# Altium PCB Ecg_4l.PcbDoc
Units mm, origin at the board's own origin, x right, y up, seen from the top; angles counter-clockwise.
Board outline 50 x 50 mm, 4 copper layers (Top Layer, GND layer, Power layer, Bottom Layer), stack 0.625 mm thick; 101 components, 70 nets, 378 pads, 582 vias.
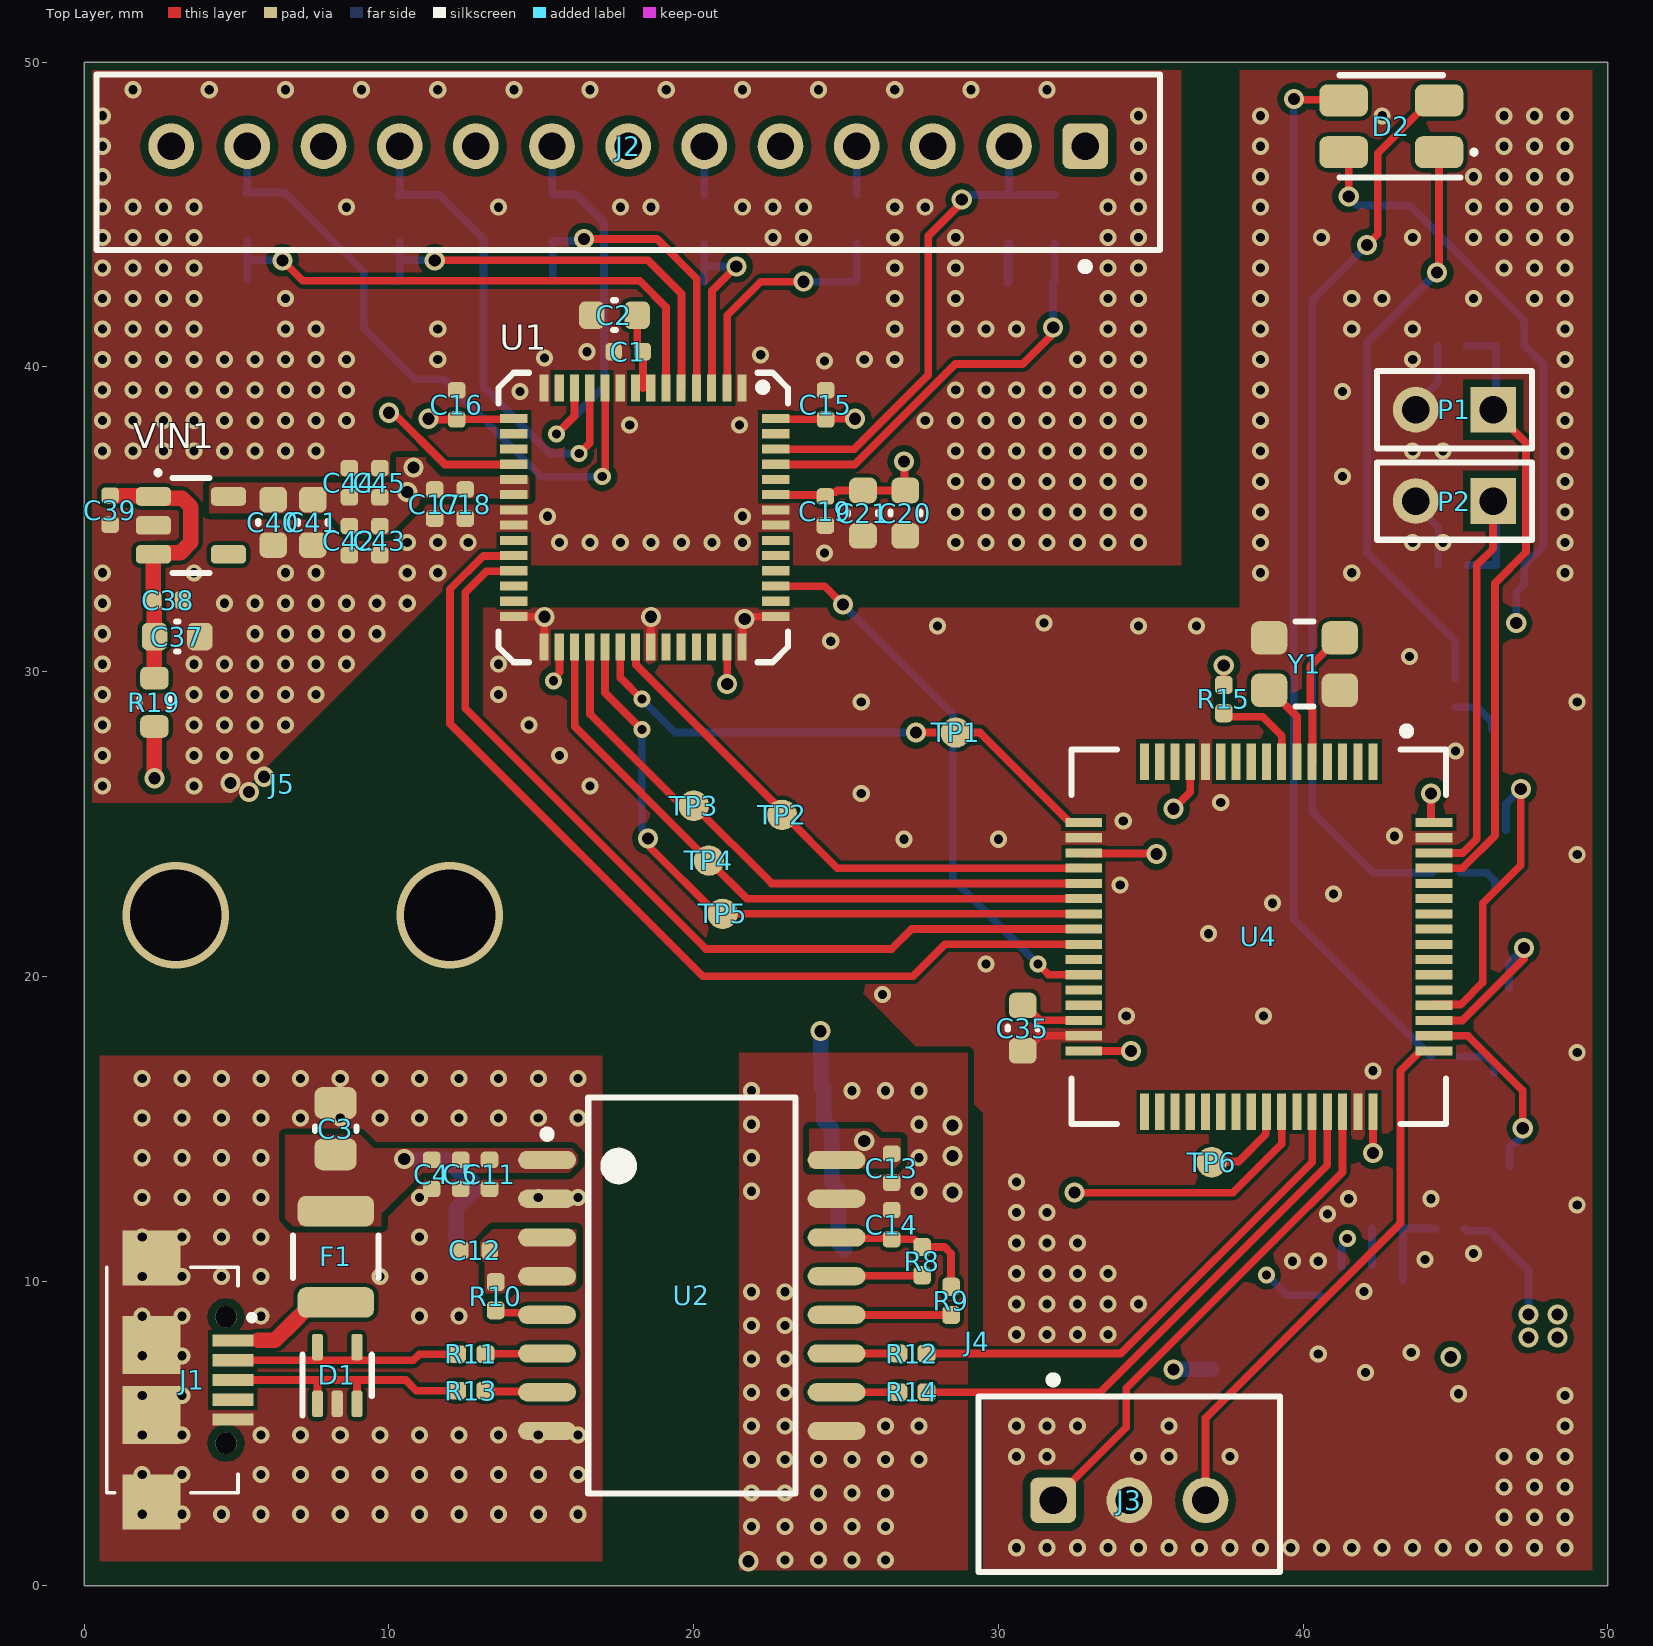
[diagram p0: Top Layer view]
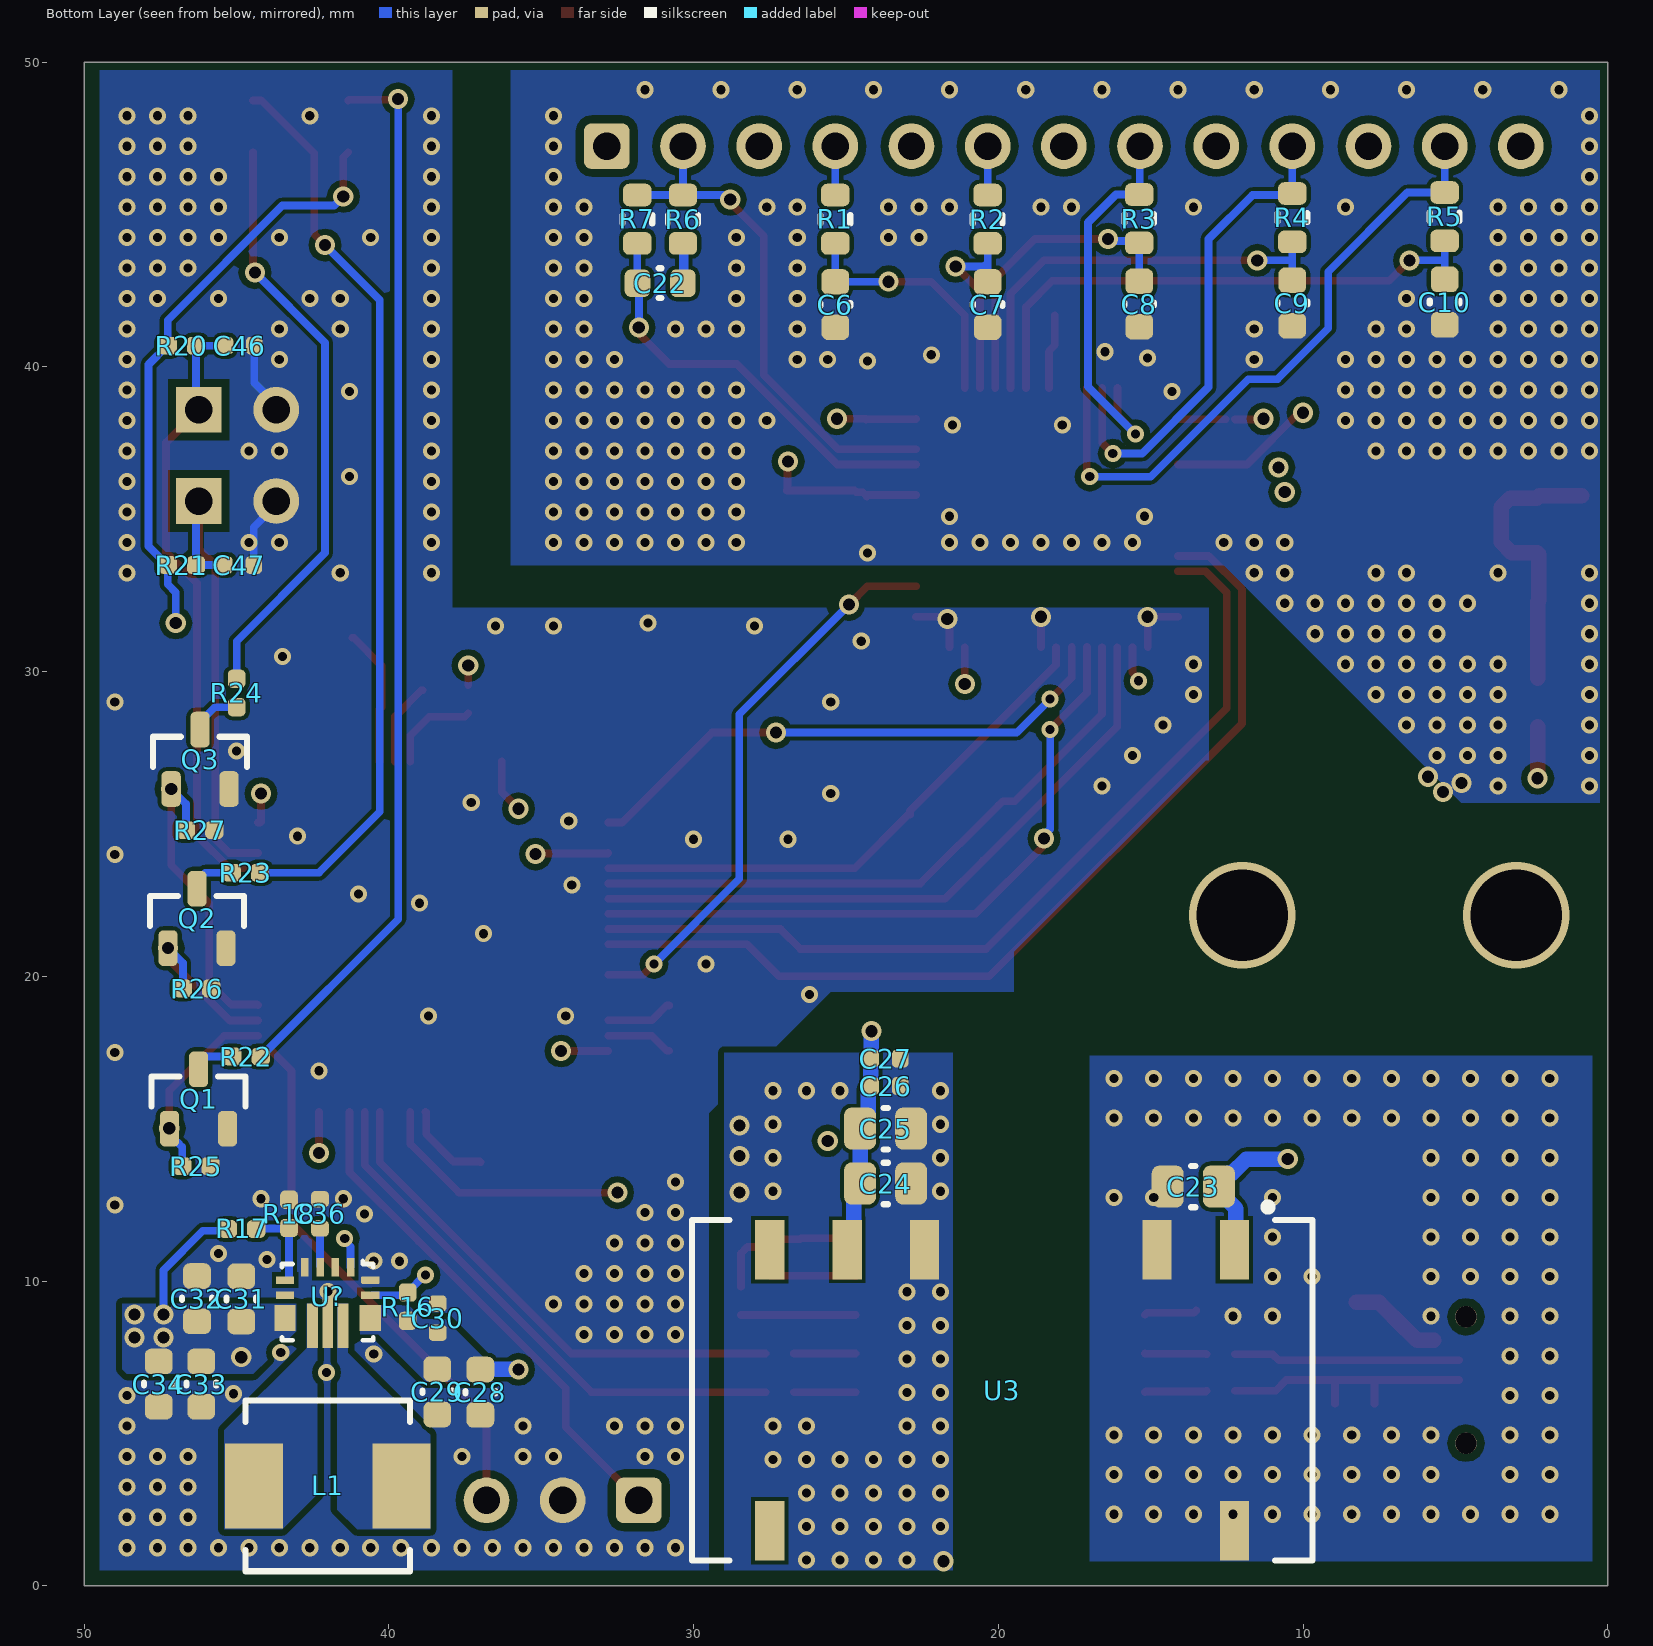
[diagram p1: Bottom Layer view, seen from below]
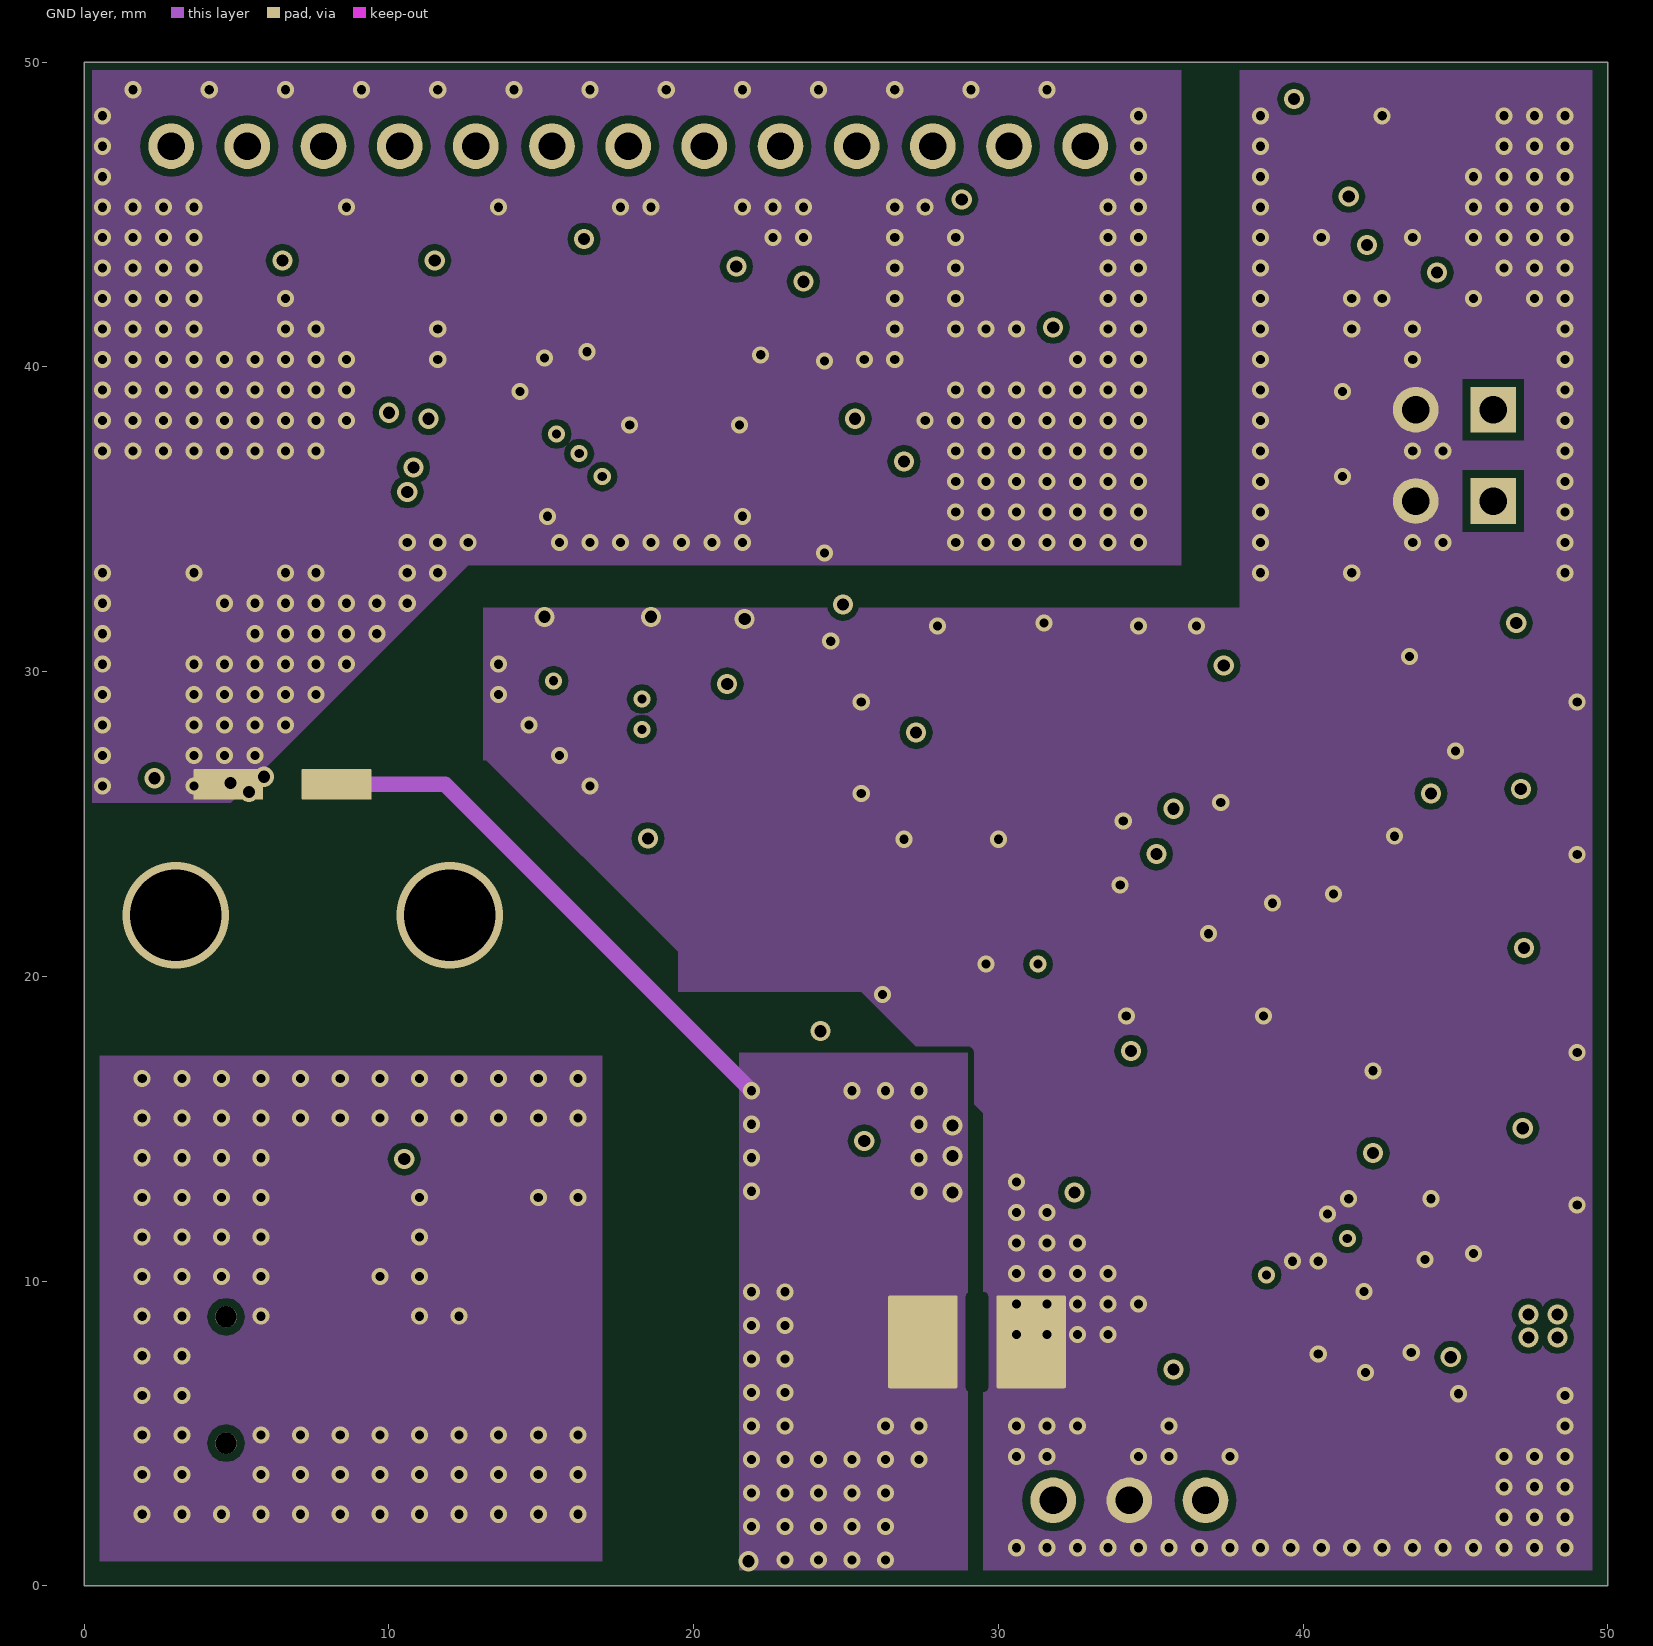
[diagram p2: GND layer]
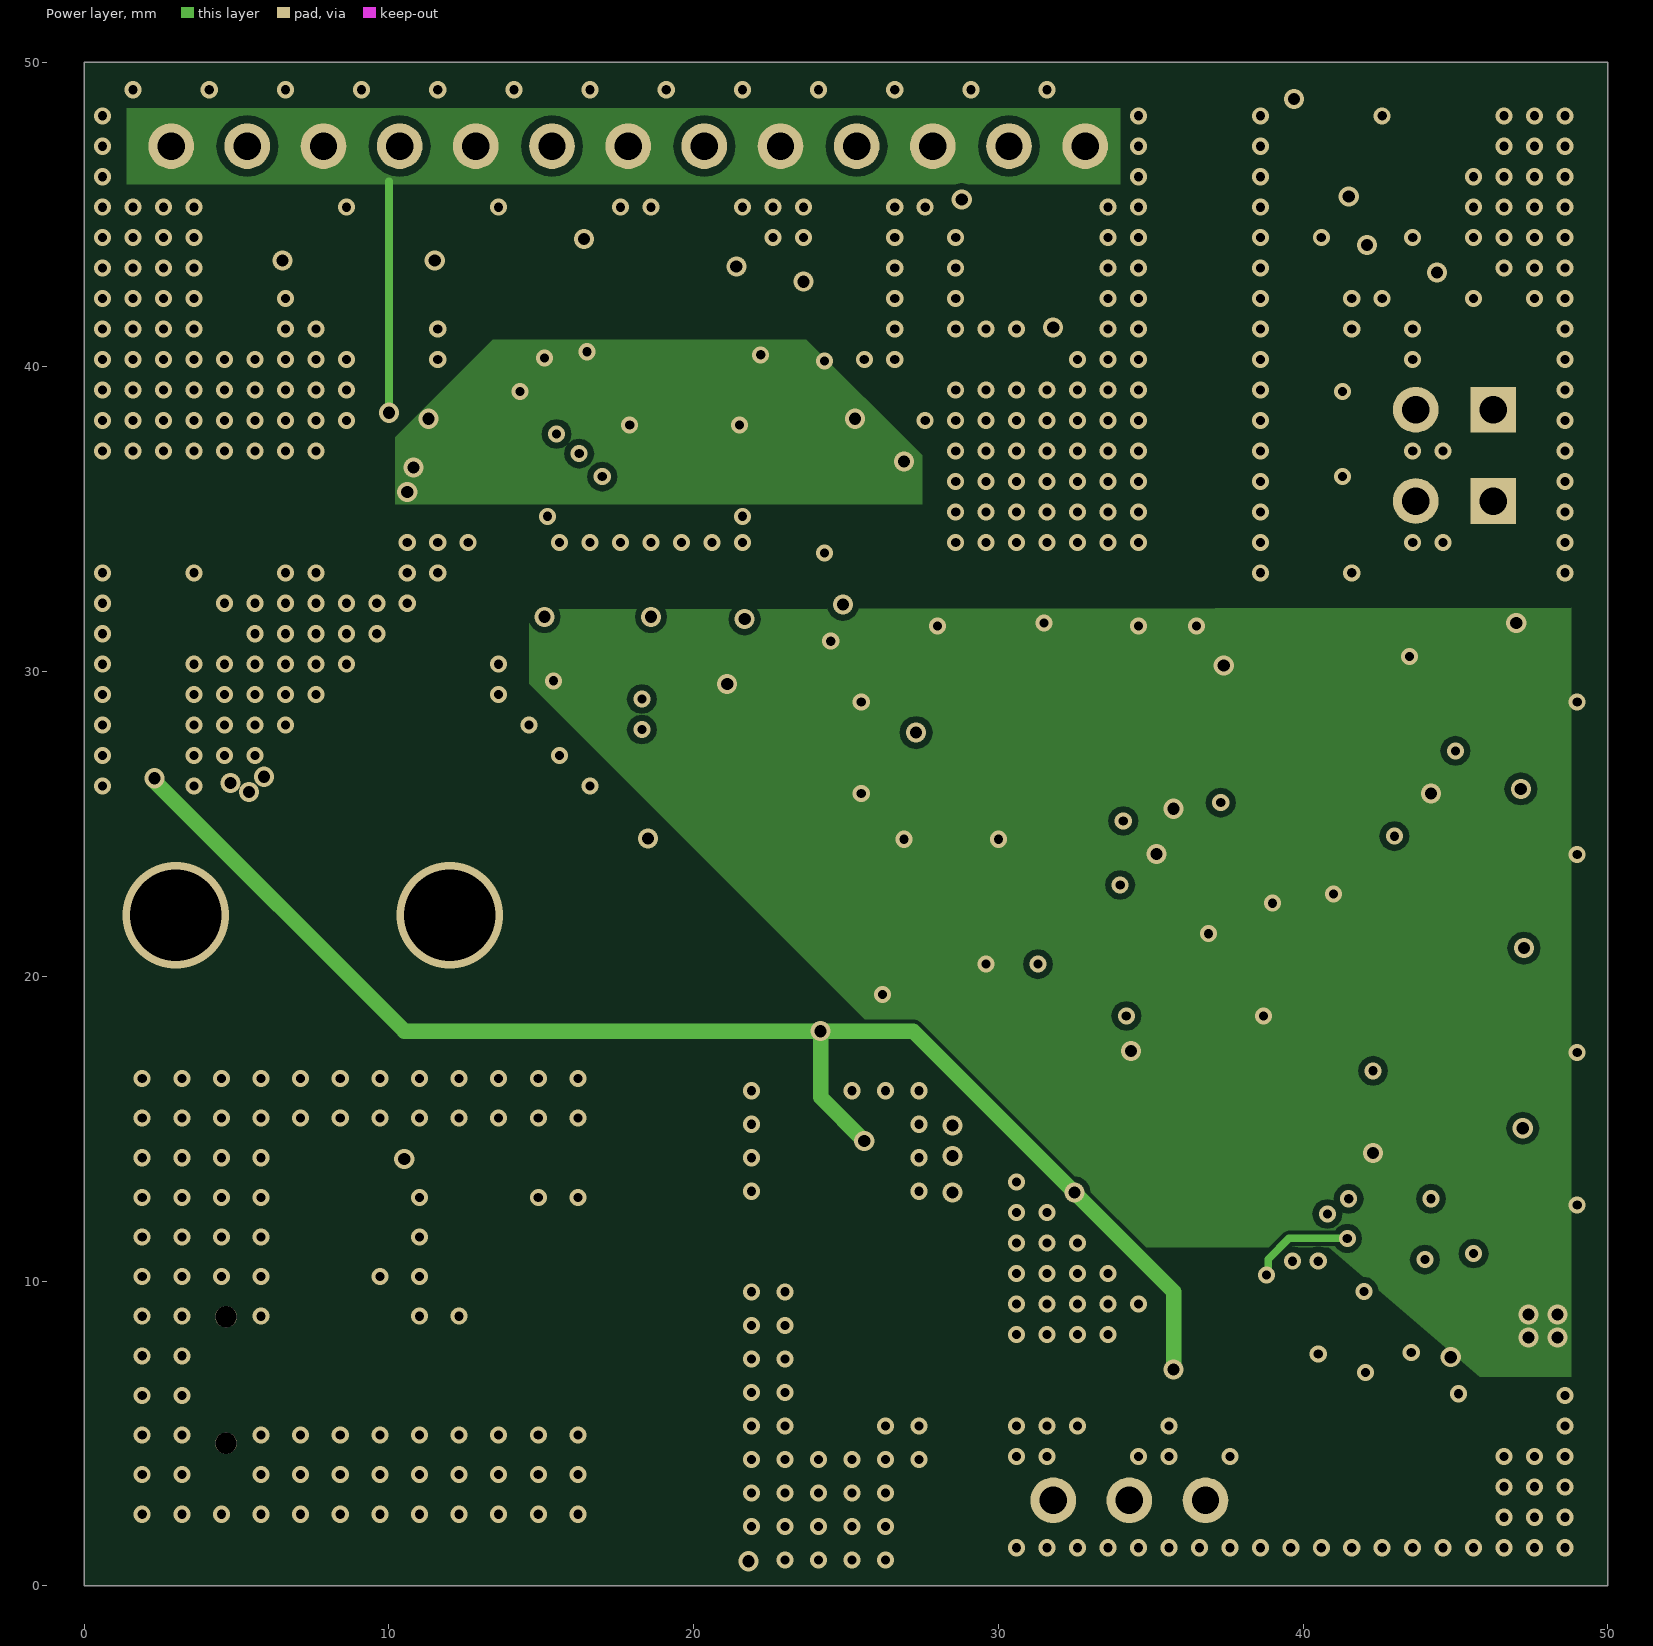
[diagram p3: Power layer]
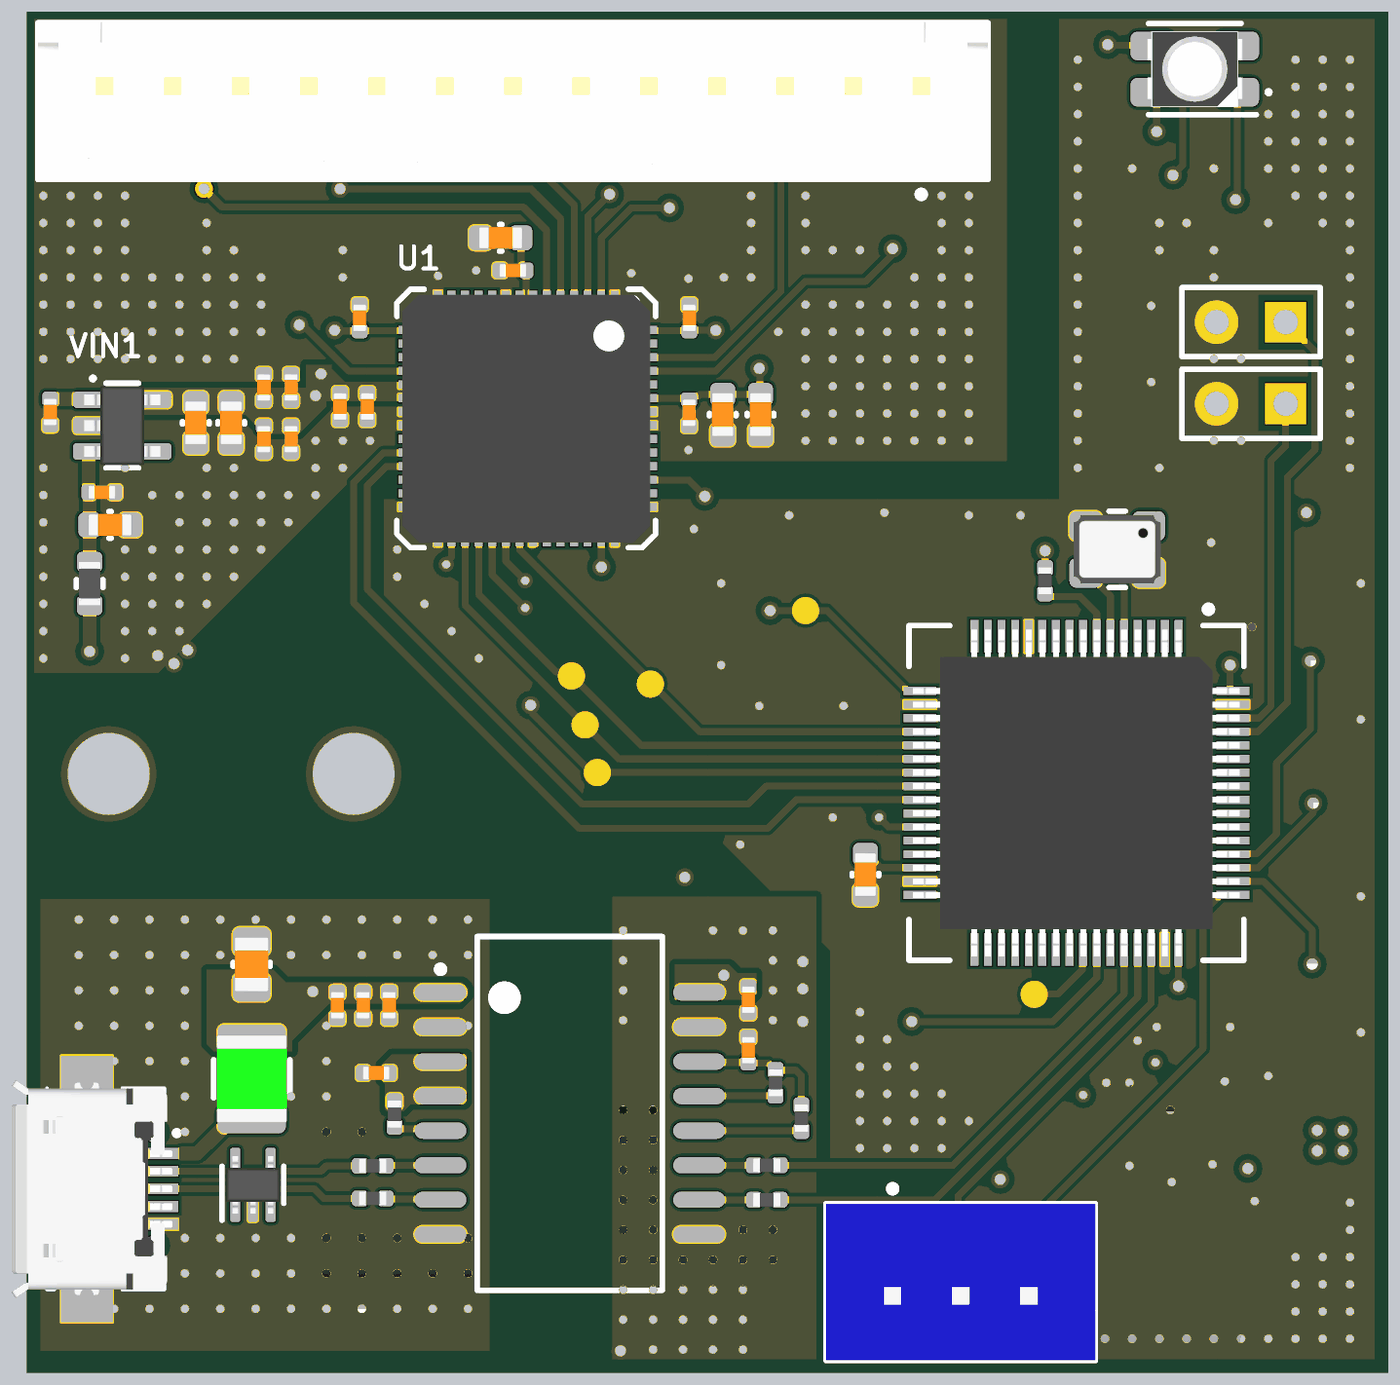
[diagram p4: 3D render of the assembled board from above, using the file's embedded part models]
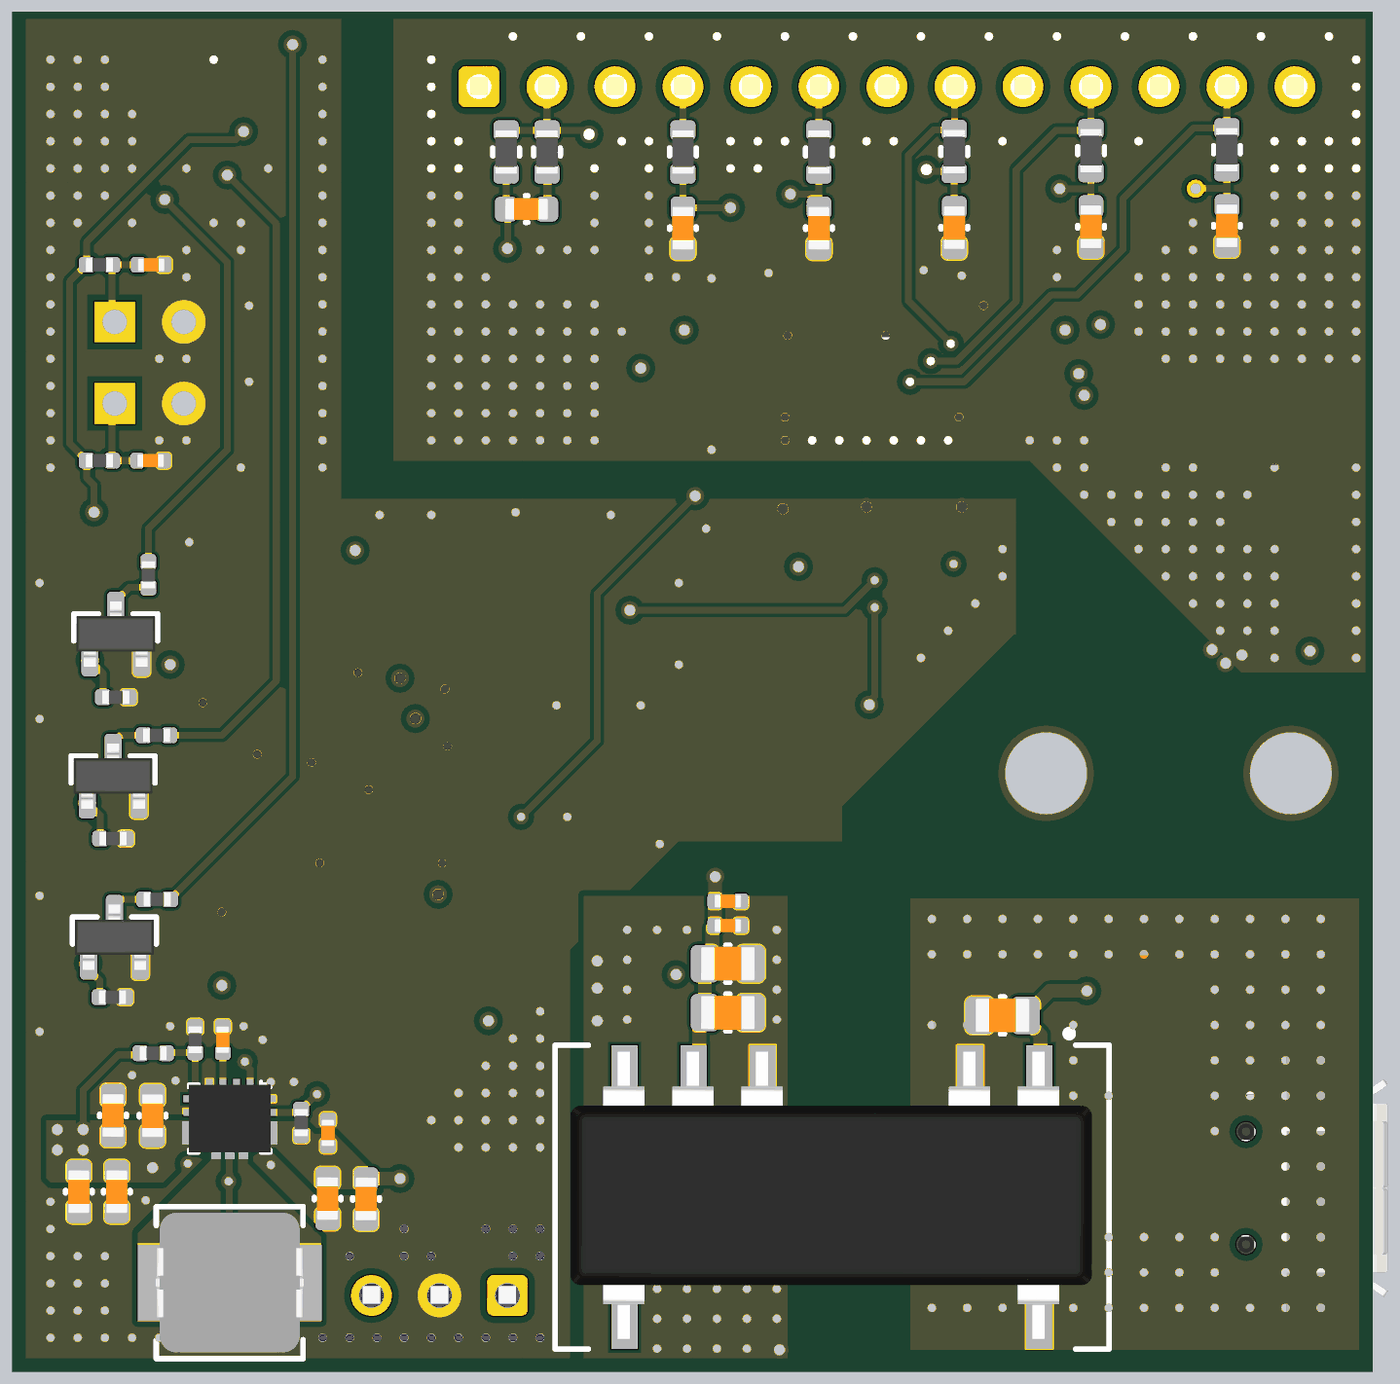
[diagram p5: 3D render of the assembled board from below, using the file's embedded part models]

## Layer stack, top to bottom
Top Solder: solder mask 0.0102, Solder Resist, Dk 3.5
Top Layer: signal copper 0.0356
Dielectric 2: prepreg 0.2083, PP-022, Dk 4.5
GND layer: signal copper 0.0178
Dielectric 1: core 0.1016, FR-4, Dk 4.5
Power layer: signal copper 0.0178
Dielectric 3: prepreg 0.2083, PP-022, Dk 4.5
Bottom Layer: signal copper 0.0356
Bottom Solder: solder mask 0.0102, Solder Resist, Dk 3.5

## Board outline
0,0 50,0 50,50 0,50

## Design rules (kind name [scope] priority, off if disabled: settings)
BoardOutlineClearance [All] p1: gap=0.254 ignorepadtopadclearanceinfootprint=FALSE except(0: Arc-SplitContinuation Track-SplitContinuation SMDPad-SplitContinuation THPad-SplitContinuation Via-SplitContinuation Fill-SplitContinuation Poly-SplitContinuation Region-SplitContinuation Text-SplitContinuation)
Clearance [All] p1: gap=0.2 ignorepadtopadclearanceinfootprint=FALSE except(0: Fill-Hole Poly-Hole Region-Hole Text-Hole; 0.09: Arc-Arc Arc-Track Track-Track; 0.127: Arc-SMDPad Arc-Fill Arc-Poly Arc-Region Track-SMDPad Track-Fill Track-Poly Track-Region SMDPad-SMDPad SMDPad-Fill SMDPad-Poly SMDPad-Region; 0.254: Arc-Text Track-Text SMDPad-Text THPad-Fill THPad-Poly THPad-Region THPad-Text Via-Text Fill-Text Poly-Text Region-Text Text-Text; 0.3: Arc-Hole Track-Hole SMDPad-Hole; 0.5: THPad-Hole Via-Hole)
HoleSize [All] p1: absolutevalues=TRUE maxlimit=6.3 minlimit=0.2 maxpercent=80.000 minpercent=20.000
MinimumAnnularRing [All] p1: minimumring=0.13
MinimumSolderMaskSliver [All] p1: minsoldermaskwidth=0.1
PlaneClearance [All] p1: clearance=0.254
PlaneConnect [All] p1: planeconnectstyle=Direct reliefexpansion=0.508 reliefentries=4 reliefconductorwidth=0.254 reliefairgap=0.254
PolygonConnect [All] p1: connectstyle=Direct reliefconductorwidth=0.254 reliefentries=4 polygonreliefangle="90 Angle" airgapwidth=0.254
RoutingVias [All] p1: holewidth=0.4 width=0.5 viastyle="Through Hole" minholewidth=0.3 minwidth=0.4 maxholewidth=1 maxwidth=1.5
SilkToSolderMaskClearance [IsPad] p1: minsilkscreentomaskgap=0.15 clearancetoexposedcopper=TRUE
SolderMaskExpansion [All] p1: expansion=0.05 istentingtop=FALSE
Width [All] p1: maxlimit=1.016 minlimit=0.254 preferedwidth=0.254 minimp=50.000000 maximp=50.000000 favimp=50.000000
25 further rules are at their usual default settings.

## Components (designator, comment, footprint, x,y, rotation, side; value= is the part's Value field where it differs from the comment)
C1 "100n" C0402_N 17.85,40.5 r180 top
C2 "10u" C0603_N 17.4,41.7 r180 top
C3 "10u" C0805_N 8.25,15 r90 top
C4 "100n" C0402_N 11.4,13.5 r270 top
C5 "100n" C0402_N 12.35,13.5 r270 top
C6 "10n" C0603_N 25.35,42.05 r90 bottom
C7 "10n" C0603_N 20.35,42.05 r90 bottom
C8 "10n" C0603_N 15.375,42.067 r90 bottom
C9 "10n" C0603_N 10.35,42.1 r90 bottom
C10 "10n" C0603_N 5.351,42.133 r90 bottom
C11 "100n" C0402_N 13.3,13.5 r270 top
C12 "100n" C0402_N 12.827,11.007 r180 top
C13 "100n" C0402_N 26.5,13.7 r270 top
C14 "100n" C0402_N 26.5,11.85 r90 top
C15 "100n" C0402_N 24.331,38.758 r90 top
C16 "100n" C0402_N 12.22,38.758 r90 top
C17 "100n" C0402_N 11.5,35.5 r270 top
C18 "100n" C0402_N 12.5,35.5 r270 top
C19 "100n" C0402_N 24.32,35.271 r270 top
C20 "10u" C0603_N 26.946,35.202 r270 top
C21 "10u" C0603_N 25.558,35.202 r270 top
C22 "2n" C0603_N 31.1,42.75 r180 bottom
C23 "10u" C0805_N 13.6,13.1 r0 bottom
C24 "10u" C0805_N 23.7,13.2 r180 bottom
C25 "10u" C0805_N 23.7,15 r180 bottom
C26 "100n" C0402_N 23.7,16.4 r180 bottom
C27 "100n" C0402_N 23.7,17.3 r180 bottom
C28 "10u" C0603_N 37,6.35 r270 bottom
C29 "10u" C0603_N 38.413,6.363 r270 bottom
C30 "100n" C0402_N 38.4,8.78 r90 bottom
C31 "22u" C0603_N 44.847,9.411 r90 bottom
C32 "10u" C0603_N 46.302,9.419 r90 bottom
C33 "1u" C0603_N 46.16,6.617 r270 bottom
C34 "100n" C0603_N 47.557,6.617 r270 bottom
C35 "10u" C0603_N 30.8,18.3 r270 top
C36 "100n" C0402_N 42.265,12.205 r90 bottom
C37 "1u" C0603_N 3.05,31.15 r0 top
C38 "100n" C0402_N 2.75,32.35 r0 top
C39 "100n" C0402_N 0.85,35.3 r270 top
C40 "10u" C0603_N 6.2,34.9 r270 top
C41 "1u" C0603_N 7.5,34.9 r270 top
C42 "100n" C0402_N 8.7,34.3 r270 top
C43 "100n" C0402_N 9.7,34.3 r270 top
C44 "100n" C0402_N 8.7,36.2 r90 top
C45 "10n" C0402_N 9.7,36.2 r90 top
C46 "100n" C0402_N 44.9,40.7 r180 bottom
C47 "100n" C0402_N 44.92,33.5 r180 bottom
D1 "ESDA25W5" SOT353_12345 8.3,6.9 r0 top
D2 "RGB" LED3528_RGB 42.9,47.9 r90 top
F1 "FUSE" FUSE1210 8.255,10.795 r270 top
J1 "USB_OTG" WR-COM-629105136821 2.2,5.6 r270 top
J2 "" B13B-XH-A 17.85,47.25 r180 top
J3 "" B3B-XH-A 31.8,2.8 r0 top
J4 "2 way net tie junction" 2way_HP#1 29.3,8 r0 top net-tie
J5 "2 way net tie junction" 2way_HP#2 6.5,26.3 r180 top net-tie
L1 "1.5u" IHLP2020 42.011,3.273 r0 bottom
P1 "Header 2" HDR1X2 46.24,38.6 r180 top
P2 "Header 2" HDR1X2 46.24,35.6 r180 top
Q1 "MOSFET_N" SOT23_123_N 46.25,15.975 r180 bottom
Q2 "MOSFET_N" SOT23_123_N 46.3,21.9 r180 bottom
Q3 "MOSFET_N" SOT23_123_N 46.2,27.125 r180 bottom
R1 "1k" R0603_N 25.35,44.85 r90 bottom
R2 "10k" R0603_N 20.35,44.85 r90 bottom
R3 "10k" R0603_N 15.375,44.867 r90 bottom
R4 "10k" R0603_N 10.35,44.9 r90 bottom
R5 "10k" R0603_N 5.351,44.933 r90 bottom
R6 "100k" R0603_N 30.35,44.85 r90 bottom
R7 "330k" R0603_N 31.85,44.85 r90 bottom
R8 "1M" R0402_N 27.5,10.65 r90 top
R9 "1M" R0402_N 28.45,9.35 r90 top
R10 "1M" R0402_N 13.5,9.5 r270 top
R11 "24R" R0402_N 12.7,7.6 r0 top
R12 "24R" R0402_N 27.178,7.62 r0 top
R13 "24R" R0402_N 12.7,6.4 r0 top
R14 "24R" R0402_N 27.178,6.35 r0 top
R15 "10k" R0402_N 37.4,29.1 r270 top
R16 "10k" R0402_N 39.386,9.157 r90 bottom
R17 "10k" R0402_N 44.825,11.707 r180 bottom
R18 "10k" R0402_N 43.281,12.205 r90 bottom
R19 "10R" R0603_N 2.3,28.995 r270 top
R20 "24R" R0402_N 46.8,40.7 r180 bottom
R21 "24R" R0402_N 46.8,33.5 r180 bottom
R22 "24R" R0402_N 44.677,17.368 r180 bottom
R23 "24R" R0402_N 44.7,23.4 r180 bottom
R24 "24R" R0402_N 45,29.3 r90 bottom
R25 "24R" R0402_N 46.324,13.769 r0 bottom
R26 "24R" R0402_N 46.3,19.6 r0 bottom
R27 "24R" R0402_N 46.2,24.8 r0 bottom
TP1 "TP" TP_1MM 28.6,28 r0 top
TP2 "TP" TP_1MM 22.9,25.3 r0 top
TP3 "TP" TP_1MM 20,25.6 r0 top
TP4 "TP" TP_1MM 20.5,23.8 r0 top
TP5 "TP" TP_1MM 20.95,22.05 r0 top
TP6 "TP" TP_1MM 37,13.9 r0 top
U1 "ADAS1000" LFCSP-56 21.59,39.81 r270 top
U2 "ADuM4160" "SOIC-16 Wide" 19.939,9.525 r0 top
U3 "DCPA10505" "SOP-14 (isolator)" 12.25,11.03 r270 bottom
U4 "STM32F446RE" LQFP64 42.3,27.05 r270 top
U? "TPS63070" RNM0015A 42.011,9.306 r270 bottom
VIN1 "ADP151" SOT23-5 3.5,34.8 r270 top
Y1 "XTAL_1234" 3225_N 40.05,30.25 r180 top

## Footprints (in the part's own frame and the unit in brackets; to place one, negate y for a bottom-side part, rotate by r counter-clockwise, add the part's x,y. Pads: shape width x height; smd on the part's side, far side on the other; paste and mask are expansions set on the pad)
2way_HP#1 [mil] "2 way high power power net tie junction"
  rrect5% 90x120 on Mid1 paste-100: 1(-70,0) 2(70,0)
2way_HP#2 [mil] "2 way high power power net tie junction"
  rrect5% 90x39.37 on Mid1 paste-100: 1(-70,0) 2(70,0)
3225_N [mm] "Oscillator, Corner Concave; 3.20 mm L X 2.50 mm W X 0.75 mm H body"
  rrect46% 1.19x1.09 smd: 1(-1.16,-0.86) 2(1.16,-0.86) 3(1.16,0.86) 4(-1.16,0.86)
  silkscreen extent -0.3,-1.4 0.3,1.4, body extent -1.6,-1.25 1.6,1.25, height 0.75
B3B-XH-A [mm] "Header, Vertical, 2.50 mm pitch; 0.70 mm lead width, 5 pins, 1 row, 5 pins per row, 14.90 mm L X 5.75 mm W X 7.00 mm H body"
  rrect33% 1.5x1.5 / inner round 1.5 / far side rrect33% 1.5x1.5 hole 0.9 paste-1.5: 1(0,0)
  round 1.5 hole 0.9 paste-1.5: 2(2.5,0) 3(5,0)
  silkscreen extent -2.45,-2.35 7.45,4.08, body extent -2.45,-2.35 7.45,3.4, height 7.05
B13B-XH-A [mm] "Header, Vertical, 2.50 mm pitch; 0.70 mm lead width, 13 pins, 1 row, 13 pins per row, 34.90 mm L X 5.75 mm W X 7.00 mm H body"
  rrect33% 1.5x1.5 / inner round 1.5 / far side rrect33% 1.5x1.5 hole 0.9 paste-1.5: 1(-15,0)
  round 1.5 hole 0.9 paste-1.5: 2(-12.5,0) 3(-10,0) 4(-7.5,0) 5(-5,0) 6(-2.5,0) 7(0,0) 8(2.5,0) 9(5,0) 10(7.5,0) 11(10,0) 12(12.5,0) 13(15,0)
  silkscreen extent -17.45,-2.35 17.45,4.08, body extent -17.45,-2.37 17.45,3.38, height 7
C0402_N [mm] "Capacitor, Chip; 1.00 mm L X 0.50 mm W X 0.55 mm H body"
  rrect52% 0.54x0.58 smd: 1(-0.48,0) 2(0.48,0)
  body extent -0.5,-0.25 0.5,0.25, height 0.55
C0603_N [mm] "Capacitor, Chip; 1.60 mm L X 0.80 mm W X 0.87 mm H body"
  rrect50% 0.84x0.91 smd: 1(-0.745,0) 2(0.745,0)
  silkscreen extent -0.05,-0.49 0.05,0.49, body extent -0.8,-0.4 0.8,0.4, height 0.87
C0805_N [mm] "Capacitor, Chip; 2.00 mm L X 1.25 mm W X 1.35 mm H body"
  rrect48% 1.05x1.38 smd: 1(-0.84,0) 2(0.84,0)
  silkscreen extent -0.08,-0.68 0.08,0.68, body extent -1,-0.63 1,0.63, height 1.35
FUSE1210 [mm] "Fuse, Chip; 3.215 mm L X 2.575 mm W X 1.80 mm H body"
  rrect50% 1x2.5 smd: 1(-1.5,0) 2(1.5,0)
  silkscreen extent -0.7,-1.4 0.7,1.4, body extent -1.61,-1.29 1.61,1.29, height 1.8
HDR1X2 [mm] "Connector; Header; 2 Position"
  rect 1.5x1.5 hole 0.9: 1(0,0)
  round 1.5 hole 0.9: 2(2.54,0)
  silkscreen extent -1.27,-1.27 3.81,1.27
IHLP2020 [mm] "Inductor, 5.18mm L X 5.18mm W X 3 mm H body"
  rect 1.905x2.79 smd: 1(-2.425,0) 2(2.425,0)
  silkscreen extent -2.7,-2.8 2.7,2.8, body extent -2.73,-2.57 2.73,2.57, height 2.84
LED3528_RGB [mm] "Small Outline L-Lead (SOL), 1.70 mm pitch; 4 pin, 2.80 mm L X 3.20 mm W X 2.10 mm H body"
  rrect48% 1.05x1.59 smd: A(-0.85,1.565) B(0.85,1.565) G(0.85,-1.565) R(-0.85,-1.565)
  silkscreen extent -1.68,-2.79 1.68,1.7, body extent -1.4,-1.75 1.4,1.75, height 1.9
LFCSP-56 [mm]
  rect 0.9x0.3 smd: 1(0.5,0) 2(0.5,-0.5) 3(0.5,-1) 4(0.5,-1.5) 5(0.5,-2) 6(0.5,-2.5) 7(0.5,-3) 8(0.5,-3.5) 9(0.5,-4) 10(0.5,-4.5) 11(0.5,-5) 12(0.5,-5.5) 13(0.5,-6) 14(0.5,-6.5) 29(9,-6.5) 30(9,-6) 31(9,-5.5) 32(9,-5) 33(9,-4.5) 34(9,-4) 35(9,-3.5) 36(9,-3) 37(9,-2.5) 38(9,-2) 39(9,-1.5) 40(9,-1) 41(9,-0.5) 42(9,0)
  rect 0.3x0.9 smd: 15(1.5,-7.5) 16(2,-7.5) 17(2.5,-7.5) 18(3,-7.5) 19(3.5,-7.5) 20(4,-7.5) 21(4.5,-7.5) 22(5,-7.5) 23(5.5,-7.5) 24(6,-7.5) 25(6.5,-7.5) 26(7,-7.5) 27(7.5,-7.5) 28(8,-7.5) 43(8,1.1) 44(7.5,1.1) 45(7,1.1) 46(6.5,1.1) 47(6,1.1) 48(5.5,1.1) 49(5,1.1) 50(4.5,1.1) 51(4,1.1) 52(3.5,1.1) 53(3,1.1) 54(2.5,1.1) 55(2,1.1) 56(1.5,1.1)
  silkscreen extent 0,-8 9.5,1.5, body extent 0.19,-7.81 9.31,2.5, height 12
LQFP64 [mm]
  rect 1.2x0.3 smd: 1(0,0) 2(0,-0.5) 3(0,-1) 4(0,-1.5) 5(0,-2) 6(0,-2.5) 7(0,-3) 8(0,-3.5) 9(0,-4) 10(0,-4.5) 11(0,-5) 12(0,-5.5) 13(0,-6) 14(0,-6.5) 15(0,-7) 16(0,-7.5) 33(11.5,-7.5) 34(11.5,-7) 35(11.5,-6.5) 36(11.5,-6) 37(11.5,-5.5) 38(11.5,-5) 39(11.5,-4.5) 40(11.5,-4) 41(11.5,-3.5) 42(11.5,-3) 43(11.5,-2.5) 44(11.5,-2) 45(11.5,-1.5) 46(11.5,-1) 47(11.5,-0.5) 48(11.5,0)
  rect 0.3x1.2 smd: 17(2,-9.5) 18(2.5,-9.5) 19(3,-9.5) 20(3.5,-9.5) 21(4,-9.5) 22(4.5,-9.5) 23(5,-9.5) 24(5.5,-9.5) 25(6,-9.5) 26(6.5,-9.5) 27(7,-9.5) 28(7.5,-9.5) 29(8,-9.5) 30(8.5,-9.5) 31(9,-9.5) 32(9.5,-9.5) 49(9.5,2) 50(9,2) 51(8.5,2) 52(8,2) 53(7.5,2) 54(7,2) 55(6.5,2) 56(6,2) 57(5.5,2) 58(5,2) 59(4.5,2) 60(4,2) 61(3.5,2) 62(3,2) 63(2.5,2) 64(2,2)
  silkscreen extent -1.12,-9.9 11.9,2.4, body extent -0.25,-9.75 11.75,2.25, height 1.56
R0402_N [mm] "Resistor, Chip; 1.00 mm L X 0.50 mm W X 0.40 mm H body"
  rrect52% 0.6x0.58 smd: 1(-0.465,0) 2(0.465,0)
  body extent -0.5,-0.25 0.5,0.25, height 0.4
R0603_N [mm] "Resistor, Chip; 1.60 mm L X 0.80 mm W X 0.55 mm H body"
  rrect51% 0.74x0.93 smd: 1(-0.795,0) 2(0.795,0)
  silkscreen extent -0.15,-0.49 0.15,0.49, body extent -0.8,-0.4 0.8,0.4, height 0.55
RNM0015A [mm]
  rect 0.6x0.25 smd mask+0.05: 1(-1.15,0.75) 2(-1.15,0.25) 3(-1.15,-0.25) 4(-1.15,-0.75)
  rect 0.25x0.6 smd mask+0.05: 5(-0.725,-1.4) 6(-0.225,-1.4) 14(-0.225,1.4)
  rect 0.85x0.7 smd mask-0.05: 7(0.525,-1.4) 8(0.525,-1.4) 12(0.525,1.4) 13(0.525,1.4)
  rect 1.45x0.35 smd mask-0.05: 9(0.775,-0.5) 11(0.775,0.5)
  rect 1.8x0.35 smd mask-0.05: 10(0.6,0)
  rrect30% 0.25x0.6 smd mask+0.05: 15(-0.725,1.4)
  silkscreen extent -1.35,-1.5 1.25,1.5, body extent -1.25,-1.5 1.25,1.5, height 1
"SOIC-16 Wide" [mm] "SOIC, 16-Leads, Body 13x7.50mm, Pitch 1.27mm, IPC Medium Density"
  oval 1.9x0.6 smd: 1(-4.75,4.445) 2(-4.75,3.175) 3(-4.75,1.905) 4(-4.75,0.635) 5(-4.75,-0.635) 6(-4.75,-1.905) 7(-4.75,-3.175) 8(-4.75,-4.445) 9(4.75,-4.445) 10(4.75,-3.175) 11(4.75,-1.905) 12(4.75,-0.635) 13(4.75,0.635) 14(4.75,1.905) 15(4.75,3.175) 16(4.75,4.445)
  silkscreen extent -4.87,-6.5 3.4,6.5, body extent -3.8,-5.25 3.8,5.25, height 2.65
"SOP-14 (isolator)" [mm] "SOP-14, 7-Leads, Body 7x19mm, Pitch 2,54mm"
  rect 1.95x0.96 smd: 1(0,0) 2(0,-2.54) 5(0,-10.17) 6(0,-12.71) 7(0,-15.25) 8(9.23,-15.25) 14(9.23,0)
  silkscreen extent -1.52,-17.8 10.2,2.56, body extent -0.73,-17.24 9.83,1.94, height 4.55
SOT23-5 [mm] "Small Outline Transistor (SOT23), 0.95 mm pitch; 5 pin, 2.90 mm L X 1.60 mm W X 1.45 mm H body"
  rrect49% 0.61x1.16 smd: 1(-0.95,-1.23) 2(0,-1.23) 3(0.95,-1.23) 4(0.95,1.23) 5(-0.95,1.23)
  silkscreen extent -1.8,-1.15 1.56,0.6, body extent -1.45,-1.4 1.45,1.4, height 1.45
SOT23_123_N [mm] "Small Outline Transistor (SOT23), 0.95 mm pitch; 3 pin, 2.90 mm L X 1.30 mm W X 1.10 mm H body"
  rrect51% 0.63x1.17 smd: 1(-0.95,-0.975) 2(0.95,-0.975) 3(0,0.975)
  silkscreen extent -1.54,-0.25 1.54,0.74, body extent -1.45,-1.2 1.45,1.2, height 1.1
SOT353_12345 [mm] "Small Outline Transistor (SOT23), 0.65 mm pitch; 5 pin, 2.00 mm L X 1.25 mm W X 1.00 mm H body"
  rrect49% 0.37x0.87 smd: 1(-0.65,-0.93) 2(0,-0.93) 3(0.65,-0.93) 4(0.65,0.93) 5(-0.65,0.93)
  silkscreen extent -1.14,-1.31 1.14,0.68, body extent -1,-1.05 1,1.05, height 1
TP_1MM [mm]
  round 1 smd paste-100 mask+0: 1(0,0)
WR-COM-629105136821 [mm] "5 pins"
  rect 0.4x1.35 smd: D_N(-1.8,2.675) D_P(-1.15,2.675) GND(0.15,2.675) ID(-0.5,2.675) VBUS(-2.45,2.675)
  rect 1.8x1.9 smd: S(-5.15,0) S(2.85,0)
  rect 1.9x1.9 smd: S(-2.3,0) S(0,0)
  round 0.7 hole 0.7 unplated: ""(-3.225,2.45) ""(0.925,2.45)
  silkscreen extent -4.85,-1.46 2.55,3.36, body extent -5.15,-2.76 2.85,3.15, height 2.69

## Part data
C1 C2 C3 C4 C5 C6 C7 C8 C9 C10 C11 C12 C13 C14 C15 C16 C17 C18 C19 C20 C21 C22 C23 C24 C25 C26 C27 C28 C29 C30 C31 C32 C33 C34 C35 C36 C37 C38 C39 C40 C41 C42 C43 C44 C45 C46 C47: library part CAP, RevS="$Rev:: 58        $"
D2: library part LED_RGB_CANODE
J1: "USB Connector, With Pegs, Micro USB Type B, USB 2.0, Receptacle, 5 Ways, Surface Mount, Right Angle"
J2: library part PINHDR_13X1, "Header", ComponentLink1Description=Manufacturer, ComponentLink1URL=http://www.we-online.de, ComponentLink2Description=Datasheet, ComponentLink2URL=http://katalog.we-online.de/em/datasheet/691412320002.pdf
J3: library part PINHDR_3X1, "Socket", ComponentLink1Description=Manufacturer, ComponentLink1URL=http://www.we-online.de, ComponentLink2Description=Datasheet, ComponentLink2URL=http://katalog.we-online.de/em/datasheet/691412320002.pdf
J4 J5: library part NetTie_2, ComponentLink1Description=Source, ComponentLink1URL=http://www.edatools.cz/addons, FootprintNote="LP=12mil, MP=40mil, HP=120mil"
L1: library part IND, "Inductor"
P1 P2: "Header, 2-Pin", LatestRevisionDate=17-Jul-2002, LatestRevisionNote="Re-released for DXP Platform.", Publisher="Altium Limited"
R1 R2 R3 R4 R5 R6 R7 R8 R9 R10 R11 R12 R13 R14 R15 R16 R17 R18 R19 R20 R21 R22 R23 R24 R25 R26 R27: library part RES
U1: "Low Power, Five Electrode / Electrocardiogram (ECG) Analog Front End"
U?: "2-V to 16-V Buck-Boost Converter With 3.6-A Switch Current"

## Via types
v1: diameter 0.56, hole 0.3, Top Layer to Bottom Layer, tented both sides, 528 vias
v2: diameter 0.66, hole 0.4, Top Layer to Bottom Layer, tented both sides, 51 vias
v3: diameter 3.5, hole 3, Top Layer to Bottom Layer, tented both sides, 2 vias
v4: diameter 0.66, hole 0.4, Top Layer to Bottom Layer, 1 vias

## Nets (pads, with @x,y where several pads share a name; then routed paths per layer and width w, separated by ;. In a path a pad name is that pad's centre, name@x,y a point inside that pad or via, vN(x,y) a via of type N, cw(c..) or ccw(c..) an arc to the next point about the centre after c; other vN are vias at no path point)
ADAS_CLKIO: U1.45 U4.27 | length 18.5
  Top Layer w0.254: U1.45@22.7,32.8 24.3,32.8 v2(24.9,32.2) ; v1(31.3,20.4) 31.65,20.05 U4.27
  Bottom Layer w0.254: v2(24.9,32.2) 28.5,28.6 28.5,23.2 v1(31.3,20.4)
ADAS_CS: TP2.1 U1.35 U4.20 | length 18.1
  Top Layer w0.254: U1.35@18.1,30.8 18.105,30.795 18.105,30.224 22.9,25.429 TP2.1 ; TP2.1@22.932,25.332 24.713,23.55 26.3,23.55 U4.20
ADAS_DRDY: TP1.1 U1.34 U4.17 | length 18.2
  Top Layer w0.254: U1.34 17.59,29.81 v1(18.3,29.1) ; v2(27.3,28) TP1.1 29.4,28 32.35,25.05 U4.17
  Bottom Layer w0.254: v1(18.3,29.1) 19.4,28 v2(27.3,28)
ADAS_PD: U1.25 U4.24 | length 29.5
  Top Layer w0.254: U1.25@14.1,33.3 13.2,33.3 12.5,32.6 12.5,28.8 20.4,20.9 26.5,20.9 27.15,21.55 U4.24
ADAS_RESET: U1.24 U4.25 | length 31.6
  Top Layer w0.254: U1.24@14.1,33.8 13.1,33.8 12,32.7 12,28.3 20.3,20 27.2,20 28.25,21.05 U4.25
ADAS_SCLK: TP3.1 U1.32 U4.21 | length 20.7
  Top Layer w0.254: U1.32@16.6,30.8 16.6,28.6 19.457,25.743 19.857,25.743 TP3.1 ; TP3.1@20.004,25.604 22.558,23.05 U4.21
ADAS_SDI: TP5.1 U1.33 U4.23 | length 22.3
  Top Layer w0.254: U1.33 17.09,29.31 v1(18.3,28.1) ; v2(18.5,24.525) 18.578,24.447 18.578,24.222 20.75,22.05 U4.23
  Bottom Layer w0.254: v1(18.3,28.1) 18.3,24.835 18.5,24.635 v2(18.5,24.525)
ADAS_SDO: TP4.1 U1.31 U4.22 | length 21.6
  Top Layer w0.254: U1.31@16.1,30.8 16.1,28.2 TP4.1 21.75,22.55 U4.22
AGND: C1.2 C2.2 C6.1 C7.1 C8.1 C9.1 C10.1 C15.2 C16.2 C17.2 C18.2 C19.2 C20.2 C21.2 C37.2 C38.2 C39.2 C40.2 C41.2 C42.2 C43.2 C44.2 C45.2 J5.2 U1.1 U1.9 U1.14 U1.21 U1.22 U1.49 U1.50 VIN1.2
  other v1: 0.6,26.245 3.6,26.245 0.6,27.245 3.6,27.245 4.6,27.245 5.6,27.245 0.6,28.245 3.6,28.245 4.6,28.245 5.6,28.245 6.6,28.245 0.6,29.245 3.6,29.245 4.6,29.245 5.6,29.245 6.6,29.245 7.6,29.245 0.6,30.245 3.6,30.245 4.6,30.245 5.6,30.245 6.6,30.245 7.6,30.245 8.6,30.245 0.6,31.245 5.6,31.245 6.6,31.245 7.6,31.245 8.6,31.245 9.6,31.245 0.6,32.245 4.6,32.245 5.6,32.245 6.6,32.245 7.6,32.245 8.6,32.245 9.6,32.245 10.6,32.245 0.6,33.245 3.6,33.245 6.6,33.245 7.6,33.245 10.6,33.245 11.6,33.245 24.3,33.9 10.6,34.245 11.6,34.245 12.6,34.245 15.6,34.245 16.6,34.245 17.6,34.245 18.6,34.245 19.6,34.245 20.6,34.245 21.6,34.245 28.6,34.245 29.6,34.245 30.6,34.245 31.6,34.245 32.6,34.245 33.6,34.245 34.6,34.245 15.2,35.1 21.6,35.1 28.6,35.245 29.6,35.245 30.6,35.245 31.6,35.245 32.6,35.245 33.6,35.245 34.6,35.245 28.6,36.245 29.6,36.245 30.6,36.245 31.6,36.245 32.6,36.245 33.6,36.245 34.6,36.245 0.6,37.245 1.6,37.245 2.6,37.245 3.6,37.245 4.6,37.245 5.6,37.245 6.6,37.245 7.6,37.245 28.6,37.245 29.6,37.245 30.6,37.245 31.6,37.245 32.6,37.245 33.6,37.245 34.6,37.245 17.9,38.1 21.5,38.1 0.6,38.245 1.6,38.245 2.6,38.245 3.6,38.245 4.6,38.245 5.6,38.245 6.6,38.245 7.6,38.245 8.6,38.245 27.6,38.245 28.6,38.245 29.6,38.245 30.6,38.245 31.6,38.245 32.6,38.245 33.6,38.245 34.6,38.245 14.3,39.2 0.6,39.245 1.6,39.245 2.6,39.245 3.6,39.245 4.6,39.245 5.6,39.245 6.6,39.245 7.6,39.245 8.6,39.245 28.6,39.245 29.6,39.245 30.6,39.245 31.6,39.245 32.6,39.245 33.6,39.245 34.6,39.245 24.3,40.2 0.6,40.245 1.6,40.245 2.6,40.245 3.6,40.245 4.6,40.245 5.6,40.245 6.6,40.245 7.6,40.245 8.6,40.245 11.6,40.245 25.6,40.245 26.6,40.245 32.6,40.245 33.6,40.245 34.6,40.245 15.1,40.3 22.2,40.4 16.5,40.5 0.6,41.245 1.6,41.245 2.6,41.245 3.6,41.245 6.6,41.245 7.6,41.245 11.6,41.245 26.6,41.245 28.6,41.245 29.6,41.245 30.6,41.245 33.6,41.245 34.6,41.245 0.6,42.245 1.6,42.245 2.6,42.245 3.6,42.245 6.6,42.245 26.6,42.245 28.6,42.245 33.6,42.245 34.6,42.245 0.6,43.245 1.6,43.245 2.6,43.245 3.6,43.245 26.6,43.245 28.6,43.245 33.6,43.245 34.6,43.245 0.6,44.245 1.6,44.245 2.6,44.245 3.6,44.245 22.6,44.245 23.6,44.245 26.6,44.245 28.6,44.245 33.6,44.245 34.6,44.245 0.6,45.245 1.6,45.245 2.6,45.245 3.6,45.245 8.6,45.245 13.6,45.245 17.6,45.245 18.6,45.245 21.6,45.245 22.6,45.245 23.6,45.245 26.6,45.245 27.6,45.245 33.6,45.245 34.6,45.245 0.6,46.245 34.6,46.245 0.6,47.245 34.6,47.245 0.6,48.245 34.6,48.245 1.6,49.1 4.1,49.1 6.6,49.1 9.1,49.1 11.6,49.1 14.1,49.1 16.6,49.1 19.1,49.1 21.6,49.1 24.1,49.1 26.6,49.1 29.1,49.1 31.6,49.1
  other v2: 5.4,26.05 4.8,26.35 5.9,26.55
AVDD: C15.1 C16.1 C17.1 C18.1 C19.1 C20.1 C21.1 C40.1 C41.1 C42.1 C43.1 C44.1 C45.1 U1.15 U1.19 U1.20 U1.51 U1.56 VIN1.5 | length 10.5
  Top Layer w0.254: v2(11.3,38.3) 11.322,38.278 C16.1 C16.1@12.231,38.289 ; 12.531,38.289 14.089,38.289 U1.15@14.1,38.3 ; U1.51 22.7,35.8 24.272,35.8 C19.1 24.455,35.886 24.661,35.886 24.722,35.947 C21.1 26.946,35.947 26.923,35.97 26.923,36.877 v2(26.9,36.9) ; U1.56@22.7,38.3 22.711,38.289 24.32,38.289 C15.1 24.353,38.3 v2(25.3,38.3)
  other v2: 10.6,35.9 10.8,36.7
DD+: R14.2 U4.45 | length 18
  Top Layer w0.254: R14.2 33.35,6.35 40.8,13.8 U4.45
DD-: R12.2 U4.44 | length 16.9
  Top Layer w0.254: R12.2 34.02,7.62 40.3,13.9 U4.44
DGND: C28.2 C29.2 C30.2 C31.2 C32.2 C33.2 C34.2 C35.2 C36.2 C46.2 C47.2 J3.2 J4.2 P1.2 P2.2 Q1.2 Q2.2 Q3.2 R18.2 R25.1 R26.1 R27.1 U1.28 U1.29 U1.36 U1.42 U1.43 U4.12 U4.18 U4.31 U4.47 U4.63 U?.4 U?.6 U?.10 U?.15 Y1.2 Y1.4 | length 12
  Top Layer w0.254: U1.28@14.1,31.8 v2(15.1,31.8) U1.29@15.1,30.8 ; U1.36@18.6,30.8 v2(18.6,31.8) ; U1.42@21.6,30.8 21.6,31.651 21.749,31.8 U1.43@22.7,31.8 ; C35.2 30.88,17.555 31.375,18.05 U4.31
  Bottom Layer w0.254: P2.2 43.7,35.481 44.44,34.741 C47.2 ; P1.2 43.7,38.759 44.42,39.479 C46.2
  other v1: 30.6,1.245 31.6,1.245 32.6,1.245 33.6,1.245 34.6,1.245 35.6,1.245 36.6,1.245 37.6,1.245 38.6,1.245 39.6,1.245 40.6,1.245 41.6,1.245 42.6,1.245 43.6,1.245 44.6,1.245 45.6,1.245 46.6,1.245 47.6,1.245 48.6,1.245 46.6,2.245 47.6,2.245 48.6,2.245 46.6,3.245 47.6,3.245 48.6,3.245 30.6,4.245 31.6,4.245 34.6,4.245 35.6,4.245 37.6,4.245 46.6,4.245 47.6,4.245 48.6,4.245 30.6,5.245 31.6,5.245 32.6,5.245 35.6,5.245 48.6,5.245 48.6,6.245 45.1,6.3 42.05,7 40.5,7.6 43.553,7.65 30.6,8.245 31.6,8.245 32.6,8.245 33.6,8.245 30.6,9.245 31.6,9.245 32.6,9.245 33.6,9.245 34.6,9.245 42,9.65 30.6,10.245 31.6,10.245 32.6,10.245 33.6,10.245 39.65,10.65 40.5,10.65 44,10.7 45.6,10.9 30.6,11.245 31.6,11.245 32.6,11.245 40.8,12.2 30.6,12.245 31.6,12.245 49,12.5 41.5,12.7 44.2,12.7 30.6,13.245 42.3,16.9 49,17.5 34.2,18.7 38.7,18.7 26.2,19.4 29.6,20.4 36.9,21.4 39,22.4 41,22.7 34,23 49,24 26.9,24.5 30,24.5 43,24.6 34.1,25.1 37.3,25.7 25.5,26 16.6,26.245 15.6,27.245 45,27.4 14.6,28.245 25.5,29 49,29 13.6,29.245 13.6,30.245 43.5,30.5 24.5,31 28,31.5 34.6,31.5 36.5,31.5 31.5,31.6 38.6,33.245 41.6,33.245 48.6,33.245 38.6,34.245 43.6,34.245 44.6,34.245 48.6,34.245 38.6,35.245 48.6,35.245 38.6,36.245 48.6,36.245 41.3,36.4 38.6,37.245 43.6,37.245 44.6,37.245 48.6,37.245 38.6,38.245 48.6,38.245 41.3,39.2 38.6,39.245 48.6,39.245 38.6,40.245 43.6,40.245 48.6,40.245 38.6,41.245 41.6,41.245 43.6,41.245 48.6,41.245 38.6,42.245 41.6,42.245 42.6,42.245 45.6,42.245 47.6,42.245 48.6,42.245 38.6,43.245 46.6,43.245 47.6,43.245 48.6,43.245 38.6,44.245 40.6,44.245 43.6,44.245 45.6,44.245 46.6,44.245 47.6,44.245 48.6,44.245 38.6,45.245 45.6,45.245 46.6,45.245 47.6,45.245 48.6,45.245 38.6,46.245 45.6,46.245 46.6,46.245 47.6,46.245 48.6,46.245 38.6,47.245 46.6,47.245 47.6,47.245 48.6,47.245 38.6,48.245 42.6,48.245 46.6,48.245 47.6,48.245 48.6,48.245
  other v2: 21.674,31.726
DVDD: C31.1 C32.1 C33.1 C34.1 D2.A R15.1 R17.1 R20.1 R21.1 U1.30 U1.41 U4.13 U4.19 U4.32 U4.48 U4.64 U?.7 U?.8 | length 36.5
  Top Layer w0.254: v1(15.4,29.7) 15.4,29.783 15.6,29.983 U1.30@15.6,30.8 ; v2(21.1,29.6) U1.41@21.1,30.8 ; U4.32 v2(34.35,17.55) v2@34.4,17.5 ; U4.19 U4.19@32.818,24.032 ; 34.473,24.027 32.823,24.027 U4.19@32.818,24.032 ; v2(35.187,24.014) 35.168,24.032 U4.19@32.818,24.032 ; v2(35.75,25.5) 36.3,26.05 U4.13 ; R15.1 v2(37.4,30.2) ; D2.A 41.5,46.885 v2(41.5,45.6) ; v2(42.3,14.2) U4.48 ; v2(44.2,26) 44.2,25.073 44.223,25.05 U4.64
  Bottom Layer w0.254: v2(41.5,45.6) 41.8,45.3 43.5,45.3 47.265,41.535 R20.1 47.275,40.7 47.894,40.081 47.894,34.119 47.275,33.5 R21.1 47.265,32.865 47,32.6 v2(47,31.6) ; R17.1 45.347,11.65 46.107,11.65 47.4,10.357 v2(47.4,8.9)
  other v2: 44.85,7.5 47.4,8.15 48.35,8.15 48.35,8.9
ECG_LA: J2.12 R5.2 U1.10 | length 21.3
  Top Layer w0.254: v1(17,36.4) 17,36.483 17.1,36.583 17.1,39.3 U1.10
  Bottom Layer w0.254: J2.12@5.35,47.349 5.35,45.777 5.301,45.728 R5.2 6.572,45.728 9.17,43.13 9.17,41.27 10.841,39.6 11.8,39.6 15,36.4 v1(17,36.4)
ECG_LL: J2.10 R4.2 U1.11 | length 16.3
  Top Layer w0.254: v1(16.242,37.158) 16.59,37.505 U1.11
  Bottom Layer w0.254: J2.10@10.35,47.35 R4.2 10.3,45.645 11.655,45.645 13.1,44.2 13.1,39.342 15.284,37.158 v1(16.242,37.158)
ECG_RA: J2.8 R3.2 U1.12 | length 13.1
  Top Layer w0.254: v1(15.5,37.8) 16.09,38.39 U1.12
  Bottom Layer w0.254: J2.8@15.35,47.35 15.363,47.337 15.363,45.675 R3.2 16.138,45.662 17.057,44.743 17.057,39.357 v1(15.5,37.8)
ECG_V1: J2.6 R2.2 | length 1.7
  Bottom Layer w0.254: R2.2 J2.6@20.35,47.35
ECG_V2: J2.4 R1.2 | length 1.7
  Bottom Layer w0.254: R1.2 J2.4@25.35,47.35
GND: C3.2 C4.2 C5.2 C11.2 C12.2 C23.2 D1.2 J1.GND J1.S U2.2 U2.8 U3.2 U3.14
  other v1: 1.9,2.345 3.2,2.345 4.5,2.345 5.8,2.345 7.1,2.345 8.4,2.345 9.7,2.345 11,2.345 12.3,2.345 13.6,2.345 14.9,2.345 16.2,2.345 1.9,3.645 3.2,3.645 5.8,3.645 7.1,3.645 8.4,3.645 9.7,3.645 11,3.645 12.3,3.645 13.6,3.645 14.9,3.645 16.2,3.645 1.9,4.945 3.2,4.945 5.8,4.945 7.1,4.945 8.4,4.945 9.7,4.945 11,4.945 12.3,4.945 13.6,4.945 14.9,4.945 16.2,4.945 1.9,6.245 3.2,6.245 1.9,7.545 3.2,7.545 1.9,8.845 3.2,8.845 5.8,8.845 11,8.845 12.3,8.845 1.9,10.145 3.2,10.145 4.5,10.145 5.8,10.145 9.7,10.145 11,10.145 1.9,11.445 3.2,11.445 4.5,11.445 5.8,11.445 11,11.445 1.9,12.745 3.2,12.745 4.5,12.745 5.8,12.745 11,12.745 14.9,12.745 16.2,12.745 1.9,14.045 3.2,14.045 4.5,14.045 5.8,14.045 1.9,15.345 3.2,15.345 4.5,15.345 5.8,15.345 7.1,15.345 8.4,15.345 9.7,15.345 11,15.345 12.3,15.345 13.6,15.345 14.9,15.345 16.2,15.345 1.9,16.645 3.2,16.645 4.5,16.645 5.8,16.645 7.1,16.645 8.4,16.645 9.7,16.645 11,16.645 12.3,16.645 13.6,16.645 14.9,16.645 16.2,16.645
GND_ISO: C13.2 C14.2 C24.2 C25.2 C26.2 C27.2 J4.1 J5.1 U2.9 U2.15 U3.5 | length 17.8
  GND layer w0.508: J5.1 11.845,26.3 v1(21.9,16.245)
  other v1: 23,0.845 24.1,0.845 25.2,0.845 26.3,0.845 21.9,1.945 23,1.945 24.1,1.945 25.2,1.945 26.3,1.945 21.9,3.045 23,3.045 24.1,3.045 25.2,3.045 26.3,3.045 21.9,4.145 23,4.145 24.1,4.145 25.2,4.145 26.3,4.145 27.4,4.145 21.9,5.245 23,5.245 26.3,5.245 27.4,5.245 21.9,6.345 23,6.345 21.9,7.445 23,7.445 21.9,8.545 23,8.545 21.9,9.645 23,9.645 21.9,12.945 27.4,12.945 21.9,14.045 27.4,14.045 21.9,15.145 27.4,15.145 25.2,16.245 26.3,16.245 27.4,16.245
  other v2: 21.8,0.8 28.5,12.9 28.5,14.1 28.5,15.1
LED_B: Q3.1 R27.2 U4.52 | length 10.3
  Top Layer w0.254: U4.52 44.323,19.073 45.173,19.073 45.901,19.801 45.901,22.401 47.15,23.65 v2(47.15,26.15)
  Bottom Layer w0.254: R27.2 46.665,25.665 v2(47.15,26.15)
LED_G: Q2.1 R26.2 U4.51 | length 5.7
  Top Layer w0.254: U4.51 45.23,18.55 47.25,20.57 v2(47.25,20.925)
  Bottom Layer w0.254: R26.2 46.765,20.44 v2(47.25,20.925)
LED_R: Q1.1 R25.2 U4.50 | length 6.3
  Top Layer w0.254: U4.50 45.413,18.05 47.213,16.251 v2(47.213,15.013)
  Bottom Layer w0.254: R25.2 46.789,14.396 46.956,14.563 47.015,14.563 47.2,14.748 Q1.1 v2(47.213,15.013)
NetC1_1: C1.1 C2.1 U1.7 U1.8 | length 2.5
  Top Layer w0.254: C2.1 18.145,40.712 18.33,40.527 C1.1 18.34,40.49 18.34,39.31
NetC6_2: C6.2 R1.1 U1.2 | length 8.3
  Top Layer w0.254: U1.2@21.1,39.3 21.1,41.7 22.2,42.8 v2(23.6,42.8)
  Bottom Layer w0.254: v2(23.6,42.8) 23.603,42.797 25.298,42.797 25.35,42.85 R1.1
NetC7_2: C7.2 R2.1 U1.3 | length 6.7
  Top Layer w0.254: U1.3@20.6,39.3 20.6,42.5 v2(21.4,43.3)
  Bottom Layer w0.254: C7.2 20.35,43.425 ; R2.1 20.35,43.425 ; v2(21.4,43.3) 20.475,43.3 20.35,43.425
NetC8_2: C8.2 R3.1 U1.4 | length 10.2
  Top Layer w0.254: v2(16.4,44.2) 18.8,44.2 20.1,42.9 U1.4@20.1,39.3
  Bottom Layer w0.254: R3.1@15.35,44.097 15.389,44.136 16.336,44.136 v2(16.4,44.2) ; C8.2 R3.1
NetC9_2: C9.2 R4.1 U1.5 | length 14.2
  Top Layer w0.254: v2(11.5,43.5) 18.5,43.5 19.6,42.4 U1.5@19.6,39.3
  Bottom Layer w0.254: C9.2@10.3,42.795 10.3,42.845 10.35,42.895 10.35,43.55 ; R4.1 10.35,43.55 ; v2(11.5,43.5) 10.4,43.5 10.35,43.55
NetC10_2: C10.2 R5.1 U1.6 | length 18.3
  Top Layer w0.254: v4(6.5,43.5) 7.169,42.831 18.228,42.831 19.09,41.969 U1.6
  Bottom Layer w0.254: C10.2 5.351,43.508 ; R5.1 5.351,43.508 ; v4(6.5,43.5) 6.492,43.508 5.351,43.508
NetC22_1: C22.1 R7.1 U1.53 | length 13.9
  Top Layer w0.254: U1.53@22.7,36.8 25.287,36.8 28.587,40.1 30.8,40.1 31.8,41.1 v2(31.8,41.3)
  Bottom Layer w0.254: v2(31.8,41.3) 31.797,41.303 31.797,42.748 31.795,42.75 31.847,42.803 31.847,44.052 R7.1
NetC22_2: C22.2 R6.1 | length 2.6
  Bottom Layer w0.254: R6.1@30.3,44.055 30.302,44.053 30.302,42.753 30.352,42.803 30.352,44.053 R6.1
NetC35_1: C35.1 U4.30 | length 2.2
  Top Layer w0.254: C35.1 30.88,19.045 31.367,18.558 U4.30@32.8,18.558
NetC36_1: C36.1 U?.3 | length 1.2
  Bottom Layer w0.254: U?.3@42.264,10.501 42.264,11.724 C36.1
NetC37_1: C37.1 C38.1 C39.1 R19.1 VIN1.1 VIN1.3 | length 9.6
  Top Layer w0.508: C39.1 0.858,35.773 2.252,35.773 VIN1.1@2.311,35.714 ; VIN1.3 VIN1.3@2.321,33.901 ; VIN1.1 2.321,35.699 3.201,35.699 3.5,35.4 3.5,34.254 3.147,33.901 VIN1.3@2.321,33.901 ; R19.1 2.3,32.3 2.27,32.33 C38.1 2.265,32.355 2.265,33.86 2.306,33.901 VIN1.3@2.321,33.901
NetD2_B: D2.B R22.2 | length 35
  Top Layer w0.254: v2(39.7,48.8) 39.725,48.775 41.31,48.775 D2.B
  Bottom Layer w0.254: v2(39.7,48.8) 39.7,21.87 44.202,17.368 R22.2
NetD2_G: D2.G R23.2 | length 30
  Top Layer w0.254: v2(42.1,44) 42.457,44.357 42.457,47.012 44.195,48.75 D2.G
  Bottom Layer w0.254: v2(42.1,44) 40.3,42.2 40.3,25.4 42.3,23.4 R23.2
NetD2_R: D2.R R24.2 | length 19.5
  Top Layer w0.254: v2(44.4,43.1) 44.465,43.165 D2.R
  Bottom Layer w0.254: v2(44.4,43.1) 42.1,40.8 42.1,33.9 45,31 R24.2
NetF1_2: F1.2 J1.VBUS | length 3.1
  Top Layer w0.508: 5.7,8.05 6.25,8.05 6.6,8.4 6.61,8.4 7.505,9.295 F1.2
NetL1_1: L1.1 U?.11
NetL1_2: L1.2 U?.9
NetQ1_D: Q1.3 R22.1 | length 1.5
  Bottom Layer w0.254: R22.1 46.004,17.368 46.277,17.095 Q1.3@46.277,16.843
NetQ2_D: Q2.3 R23.1 | length 1.5
  Bottom Layer w0.254: R23.1 46.027,23.4 46.3,23.127 Q2.3
NetQ3_D: Q3.3 R24.1 | length 1.7
  Bottom Layer w0.254: R24.1 45.717,28.835 46.2,28.352 Q3.3
NetR8_1: R8.1 U2.13 | length 2.8
  Top Layer w0.254: U2.13 24.701,10.172 27.488,10.172 R8.1
NetR9_1: R9.1 U2.12 | length 3.8
  Top Layer w0.254: U2.12 24.691,8.888 28.447,8.888 R9.1
NetR10_2: R10.2 U2.5 | length 1.7
  Top Layer w0.254: R10.2 13.579,8.956 15.123,8.956 U2.5
NetR11_2: R11.2 U2.6 | length 2
  Top Layer w0.254: R11.2 13.175,7.61 15.179,7.61 U2.6
NetR12_1: R12.1 U2.11 | length 2
  Top Layer w0.254: U2.11 R12.1
NetR13_2: R13.2 U2.7 | length 2
  Top Layer w0.254: R13.2 13.19,6.375 15.164,6.375 U2.7
NetR14_1: R14.1 U2.10 | length 2
  Top Layer w0.254: U2.10 R14.1
NetR16_2: R16.2 U?.1 U?.14 | length 6.4
  Power layer w0.254: v1(38.8,10.2) 38.859,10.259 38.859,10.717 39.542,11.4 v1@41.4,11.4
  Bottom Layer w0.254: v1(38.8,10.2) 38.818,10.2 39.386,9.632 R16.2 39.475,9.533 U?.14@40.557,9.533 ; U?.1 41.261,11.122 41.454,11.315 v1(41.454,11.398)
NetR17_2: R17.2 R18.1 U?.5 | length 2.8
  Bottom Layer w0.254: U?.5@43.281,10.033 R18.1 43.297,11.724 44.343,11.724 R17.2
NetTP6_1: TP6.1 U4.41 | length 2.9
  Top Layer w0.254: TP6.1 37.019,13.919 37.881,13.919 38.777,14.815 38.777,15.527 U4.41
NetU4_5: U4.5 Y1.1 | length 4.5
  Top Layer w0.254: U4.5@40.308,27.05 40.308,28.76 40.234,28.834 40.234,30.184 41.16,31.11 Y1.1
NetU4_6: U4.6 Y1.3 | length 2.7
  Top Layer w0.254: Y1.3 38.94,29.39 39.8,28.53 U4.6
NRESET: R15.2 U4.7 | length 3.1
  Top Layer w0.254: R15.2 37.517,28.518 38.682,28.518 39.3,27.9 U4.7
RLD_OUT: J2.2 R6.2 R7.2 U1.54 | length 17
  Top Layer w0.254: U1.54@22.7,37.3 25.263,37.3 27.7,39.737 27.7,44.3 v2@28.85,45.45
  Bottom Layer w0.254: v2(28.8,45.5) 28.91,45.5 29.055,45.645 R6.2 ; J2.2@30.35,47.35 R6.2 ; R7.2 R6.2
SHIELD: J2.1 J2.3 J2.5 J2.7 J2.9 J2.11 J2.13 U1.18 | length 12.4
  Top Layer w0.254: v2(10,38.5) 10.137,38.5 11.837,36.8 U1.18@14.1,36.8
  Power layer w0.254: v2(10,38.5) 10,46.1
SW: C47.1 P2.1 R21.2 U4.62 | length 16
  Top Layer w0.254: U4.62 45.243,24.05 45.7,24.507 45.7,33.5 46.24,34.04 P2.1
  Bottom Layer w0.254: C47.1 R21.2 46.335,35.505 P2.1
SW2: C46.1 P1.1 R20.2 U4.61 | length 20.4
  Top Layer w0.254: U4.61 45.23,23.55 46.3,24.62 46.3,32.9 47.317,33.917 47.317,37.523 P1.1
  Bottom Layer w0.254: C46.1 R20.2 46.335,38.695 P1.1
SWCLK: J3.3 U4.49 | length 18.1
  Top Layer w0.254: J3.3 36.8,5.5 43.2,11.9 43.2,16.9 43.85,17.55 U4.49
SWDIO: J3.1 U4.46 | length 16.7
  Top Layer w0.254: J3.1 34.2,5.2 34.2,6.479 39.028,11.307 41.3,13.579 U4.46
SWO: U4.55
UD+: D1.1 D1.3 J1.D_P R13.1 | length 9.1
  Top Layer w0.254: J1.D_P 7.664,6.75 ; D1.1 7.65,6.736 7.664,6.75 ; D1.3 8.95,6.736 8.936,6.75 ; R13.1 10.9,6.4 10.55,6.75 8.936,6.75 ; 7.664,6.75 8.936,6.75
UD-: D1.4 D1.5 J1.D_N R11.1 | length 7.4
  Top Layer w0.254: J1.D_N 10.8,7.4 11,7.6 R11.1
V_ISO: C13.1 C24.1 C25.1 C26.1 C27.1 C28.1 C29.1 C30.1 R16.1 R19.2 U2.16 U3.6 U4.42 U?.12 U?.13 | length 66.2
  Top Layer w0.254: v2(32.5,12.9) 37.7,12.9 39.3,14.5 U4.42
  Top Layer w0.508: v2(2.3,26.5) R19.2
  Power layer w0.508: v2(2.3,26.5) 2.3,26.402 10.502,18.2 v2(24.164,18.2) ; v2(25.6,14.6) 24.164,16.036 v2(24.164,18.2) ; v2(35.75,7.1) 35.75,9.65 v2(32.5,12.9) 27.2,18.2 v2(24.164,18.2)
  Bottom Layer w0.508: v2(24.164,18.2) 24.164,17.316 C27.1 C26.1 24.18,16.38 24.269,16.291 24.269,15.271 C25.1 C24.1 24.75,12.99 24.75,11.24 U3.6 ; v2(35.75,7.1) 36.995,7.1 C28.1
VBUS: C3.1 C4.1 C5.1 C11.1 C23.1 F1.1 U2.1 U3.1 | length 5.2
  Bottom Layer w0.508: v2(10.5,14) 11.86,14 12.324,13.536 12.489,13.536 12.76,13.265 C23.1 12.76,12.935 12.203,12.378 U3.1@12.203,10.856
VDD1: C12.1 R10.1 U2.3 U2.4
VDD2: C14.1 R8.2 R9.2 U2.14 | length 5.1
  Top Layer w0.254: U2.14 24.719,11.4 26.47,11.4 C14.1 27.242,11.37 27.497,11.115 R8.2 28.235,11.115 28.45,10.9 R9.2
pads on no net: J1. J1.ID U1.13 U1.16 U1.17 U1.23 U1.26 U1.27 U1.37 U1.38 U1.39 U1.40 U1.44 U1.46 U1.47 U1.48 U1.52 U1.55 U3.7 U3.8 U4.1 U4.2 U4.3 U4.4 U4.8 U4.9 U4.10 U4.11 U4.14 U4.15 U4.16 U4.26 U4.28 U4.29 U4.33 U4.34 U4.35 U4.36 U4.37 U4.38 U4.39 U4.40 U4.43 U4.53 U4.54 U4.56 U4.57 U4.58 U4.59 U4.60 U?.2 VIN1.4
copper on no net:
  other v3: 3,22 12,22

## Polygon pours and split planes (outlines as drawn)
V_ISO on Top Layer "V_ISO_L01_P000" (solid, pour order 0): 23.8,13.7 26.6,13.7 26.803,13.903 26.803,14.681 26.119,14.681 25.8,15 23.8,15
AGND on Top Layer "AGND_L01_P022" (solid, pour order 22): 36,50 36,33.5 12.6,33.5 4.8,25.7 0.2,25.7 0.2,50
DGND on Top Layer "DGND_L01_P025" (solid, remove dead copper, pour order 25): 13.1,32.1 37.916,32.1 37.916,49.853 49.5,49.808 49.5,32.1 49.5,0.5 29.5,0.5 29.5,15.5 25.5,19.5 20.3,19.5 13.1,26.7
GND_ISO on Top Layer "GND_ISO_L01_P014" (solid, pour order 14): 21.5,17.5 29,17.5 29,0.5 21.5,0.5
AVDD on Top Layer "AVDD_L01_P018" (solid, pour order 18): 14.6,36.4 14.6,35.7 10.241,35.7 10.241,37.035 11.2,37.035 11.2,36.9 11.7,36.4
AVDD on Top Layer "AVDD_L01_P016" (solid, pour order 16): 4.1,36.1 4.1,35.2 8,35.2 8.7,34.5 10,34.5 11,35.5 11,36.2 8.2,36.2 4.2,36.2
GND on Top Layer "GND_L01_P013" (solid, pour order 13): 0.5,17.4 17,17.4 17,0.8 0.5,0.8
VDD1 on Top Layer "VDD1_L01_P008" (solid, pour order 8): 16.15,11.7 16.15,9.95 16.05,9.85 14.1,9.85 13.85,9.6 13.2,9.6 13.15,9.65 13.15,10.6 13,10.75 13,11.3 13.4,11.7
VBUS on Top Layer "VBUS_L01_P001" (solid, remove dead copper, pour order 1): 9.75,11.8 9.75,12.2 11.1,13.55 15.9,13.55 16.2,13.85 16.2,14.15 16,14.35 9.5,14.35 9.05,14.8 6.6,14.8 6.6,12.05 6.85,11.8
DGND on Bottom Layer "DGND_L04_P024" (solid, remove dead copper, pour order 24): 13.1,32.1 37.916,32.1 37.916,49.853 49.5,49.808 49.5,32.1 49.5,0.5 29.5,0.5 29.5,15.5 25.5,19.5 19.5,19.5 19.5,20.8 13.2,27.1 13.1,27.1
DVDD on Bottom Layer "DVDD_L04_P006" (solid, pour order 6): 48.6,6.95 48.75,7.1 48.75,9.25 43.05,9.25 43.05,8.35 44.45,6.95
V_ISO on Bottom Layer "V_ISO_L04_P004" (solid, pour order 4): 40.95,9.2 40.95,8.25 40.35,8.25 38.8,6.7 36.55,6.7 36.55,7.15 38.15,8.75 38.9,8.75 39.35,9.2
NetL1_2 on Bottom Layer "NETL1_2_L04_P003" (solid, pour order 3): 42.35,9.25 42.35,3 43.5,1.85 45.4,1.85 45.4,5.1 42.7,7.8 42.7,9.25
NetL1_1 on Bottom Layer "NETL1_1_L04_P002" (solid, pour order 2): 41.35,9.25 41.35,7.65 38.65,4.95 38.65,1.85 41.05,1.85 41.7,2.5 41.7,9.25
AGND on Bottom Layer "AGND_L04_P007" (solid, pour order 7): 36,50 36,33.5 12.6,33.5 4.8,25.7 0.2,25.7 0.2,50
GND_ISO on Bottom Layer "GND_ISO_L04_P011" (solid, pour order 11): 21.5,17.5 29,17.5 29,0.5 21.5,0.5
GND on Bottom Layer "GND_L04_P009" (solid, pour order 9): 0.5,17.4 17,17.4 17,0.8 0.5,0.8
DVDD on Power layer "DVDD_L03_P005" (solid, remove dead copper, pour order 5): 45.8,6.85 48.8,6.85 48.8,32.104 14.6,32.044 14.6,29.6 33.1,11.1 40.85,11.1
AVDD on Power layer "AVDD_L03_P017" (solid, pour order 17): 23.7,40.9 27.5,37.1 27.5,35.5 10.2,35.5 10.2,37.7 13.4,40.9
SHIELD on Power layer "SHIELD_L03_P020" (solid, pour order 20): 1.4,48.5 1.4,46 34,46 34,48.5
DGND on GND layer "DGND_L02_P019" (solid, pour order 19): 13.1,32.1 37.916,32.1 37.916,49.853 49.5,49.808 49.5,32.1 49.5,0.5 29.5,0.5 29.5,15.5 25.5,19.5 19.5,19.5 19.5,20.8 13.2,27.1 13.1,27.1
AGND on GND layer "AGND_L02_P021" (solid, pour order 21): 36,50 36,33.5 12.6,33.5 4.8,25.7 0.2,25.7 0.2,50
GND_ISO on GND layer "GND_ISO_L02_P023" (solid, pour order 23): 21.5,17.5 29,17.5 29,0.5 21.5,0.5
GND on GND layer "GND_L02_P010" (solid, pour order 10): 0.5,17.4 17,17.4 17,0.8 0.5,0.8
GND_ISO on GND layer "GND_ISO_L02_P012" (solid, pour order 12): 21.5,17.5 29,17.5 29,0.5 21.5,0.5

## Silkscreen, mask and mechanical layers (free items; w line width, h text height)
Mechanical 1:
  the board outline again, w0.254

## Text inside footprints (layer, text, board x,y; h text height)
U?: Mechanical 19 "Designator" at 42.011,9.306 h0.2 r90